# Altium PCB DAP-PCB.PcbDoc (part 1 of 5)
Units mm, origin at the board's own origin, x right, y up, seen from the top; angles counter-clockwise.
Board outline 54.75 x 54.75 mm, 6 copper layers (L1 (SIG/PWR), L2 (GND), L3 (SIG), L4 (PWR), L5 (GND), L6 (SIG/PWR)), stack 1.65 mm thick; 270 components, 172 nets, 891 pads, 308 vias.
Unrouted connection lines stored in the file: 5.
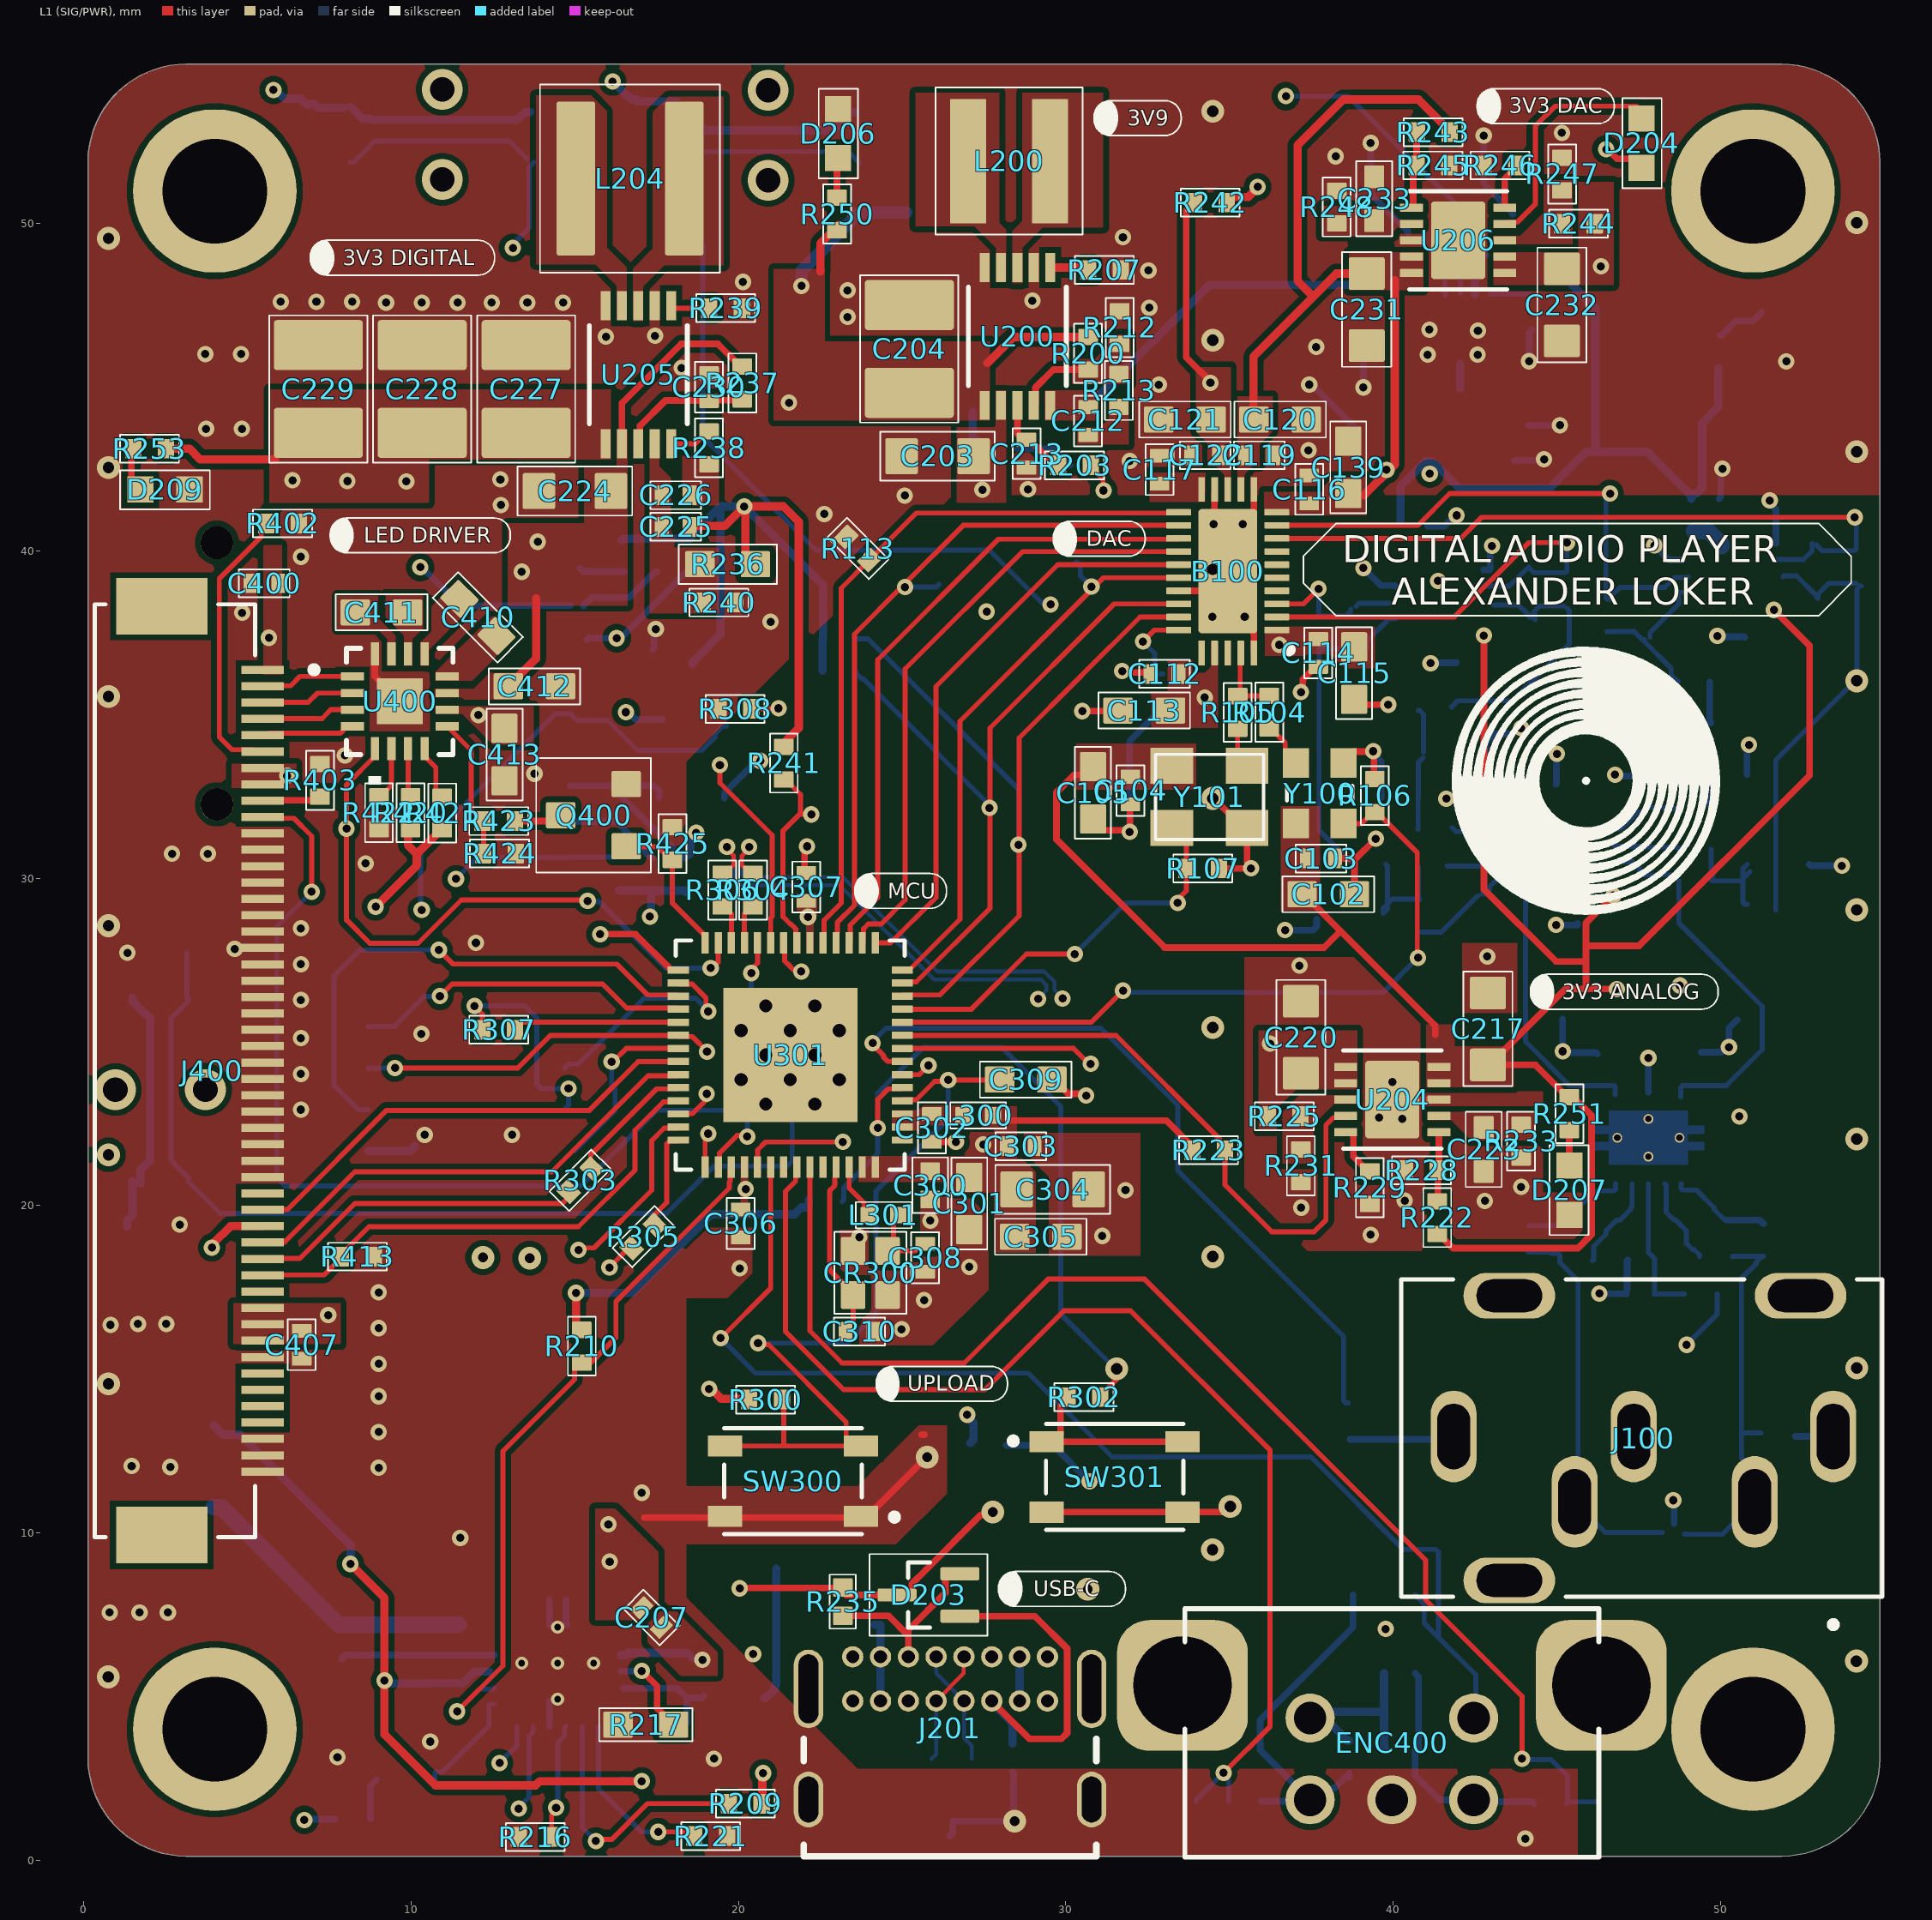
[diagram p0: L1 (SIG/PWR) view]
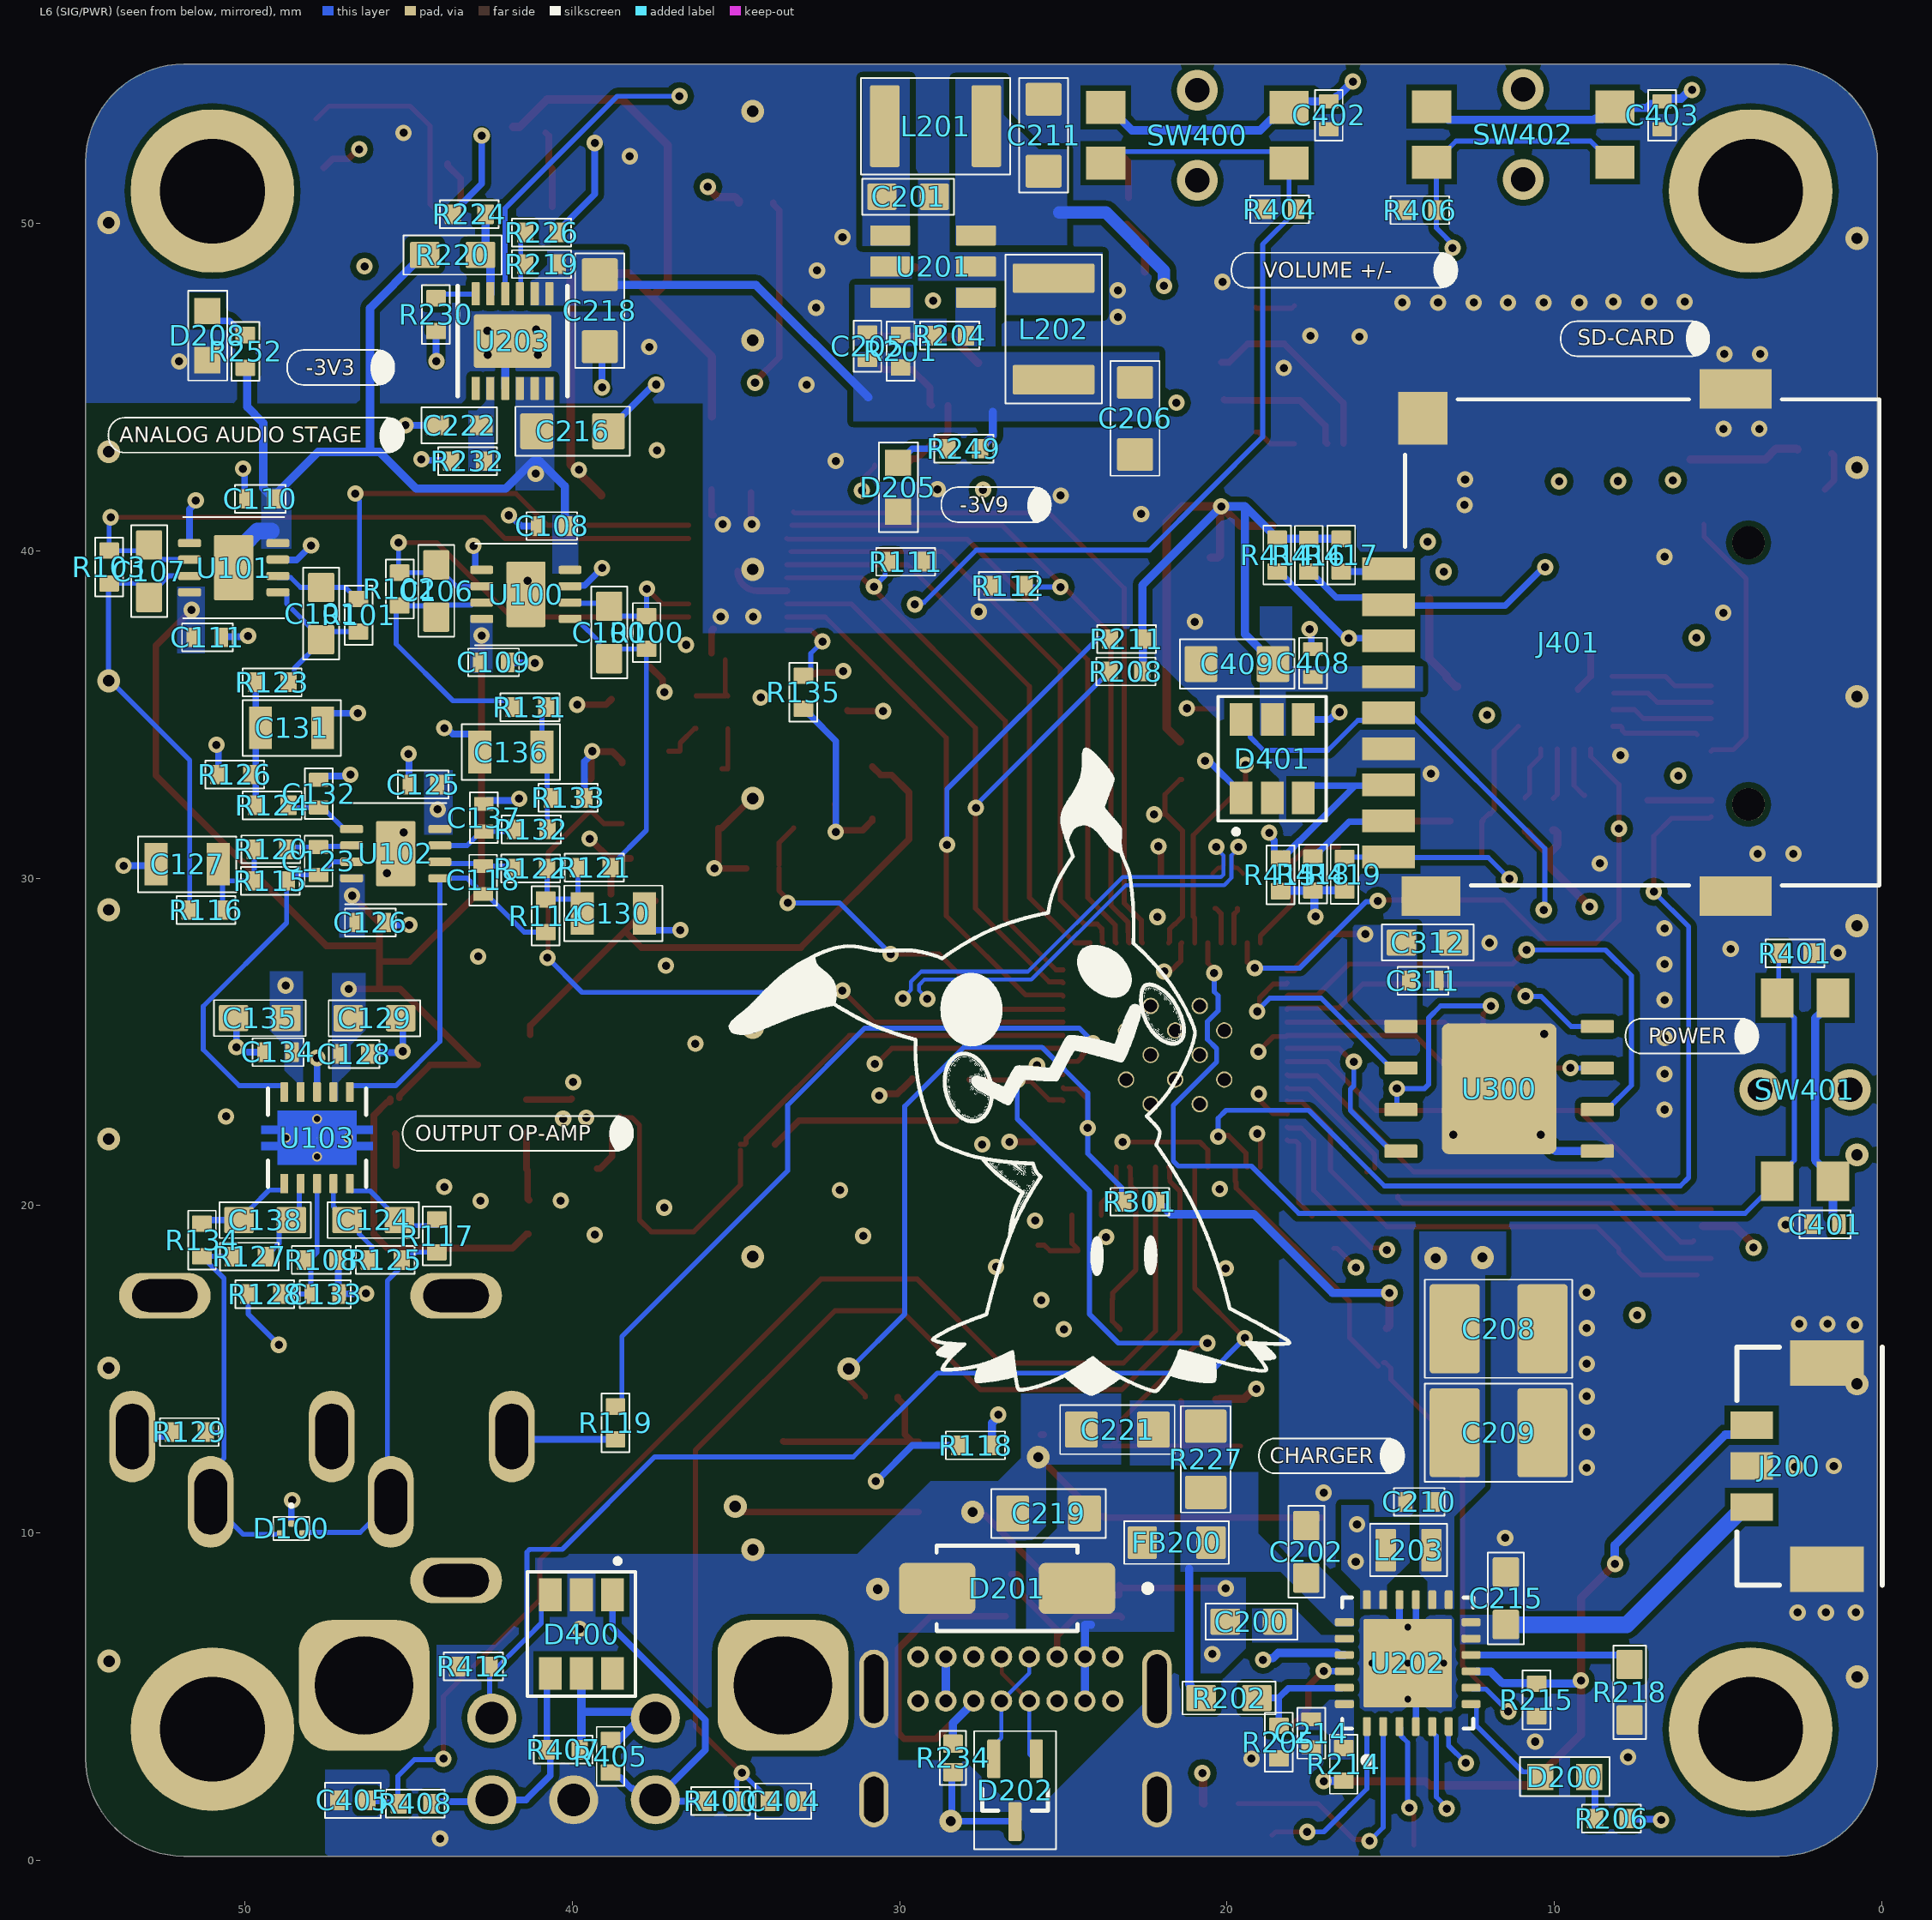
[diagram p1: L6 (SIG/PWR) view, seen from below]
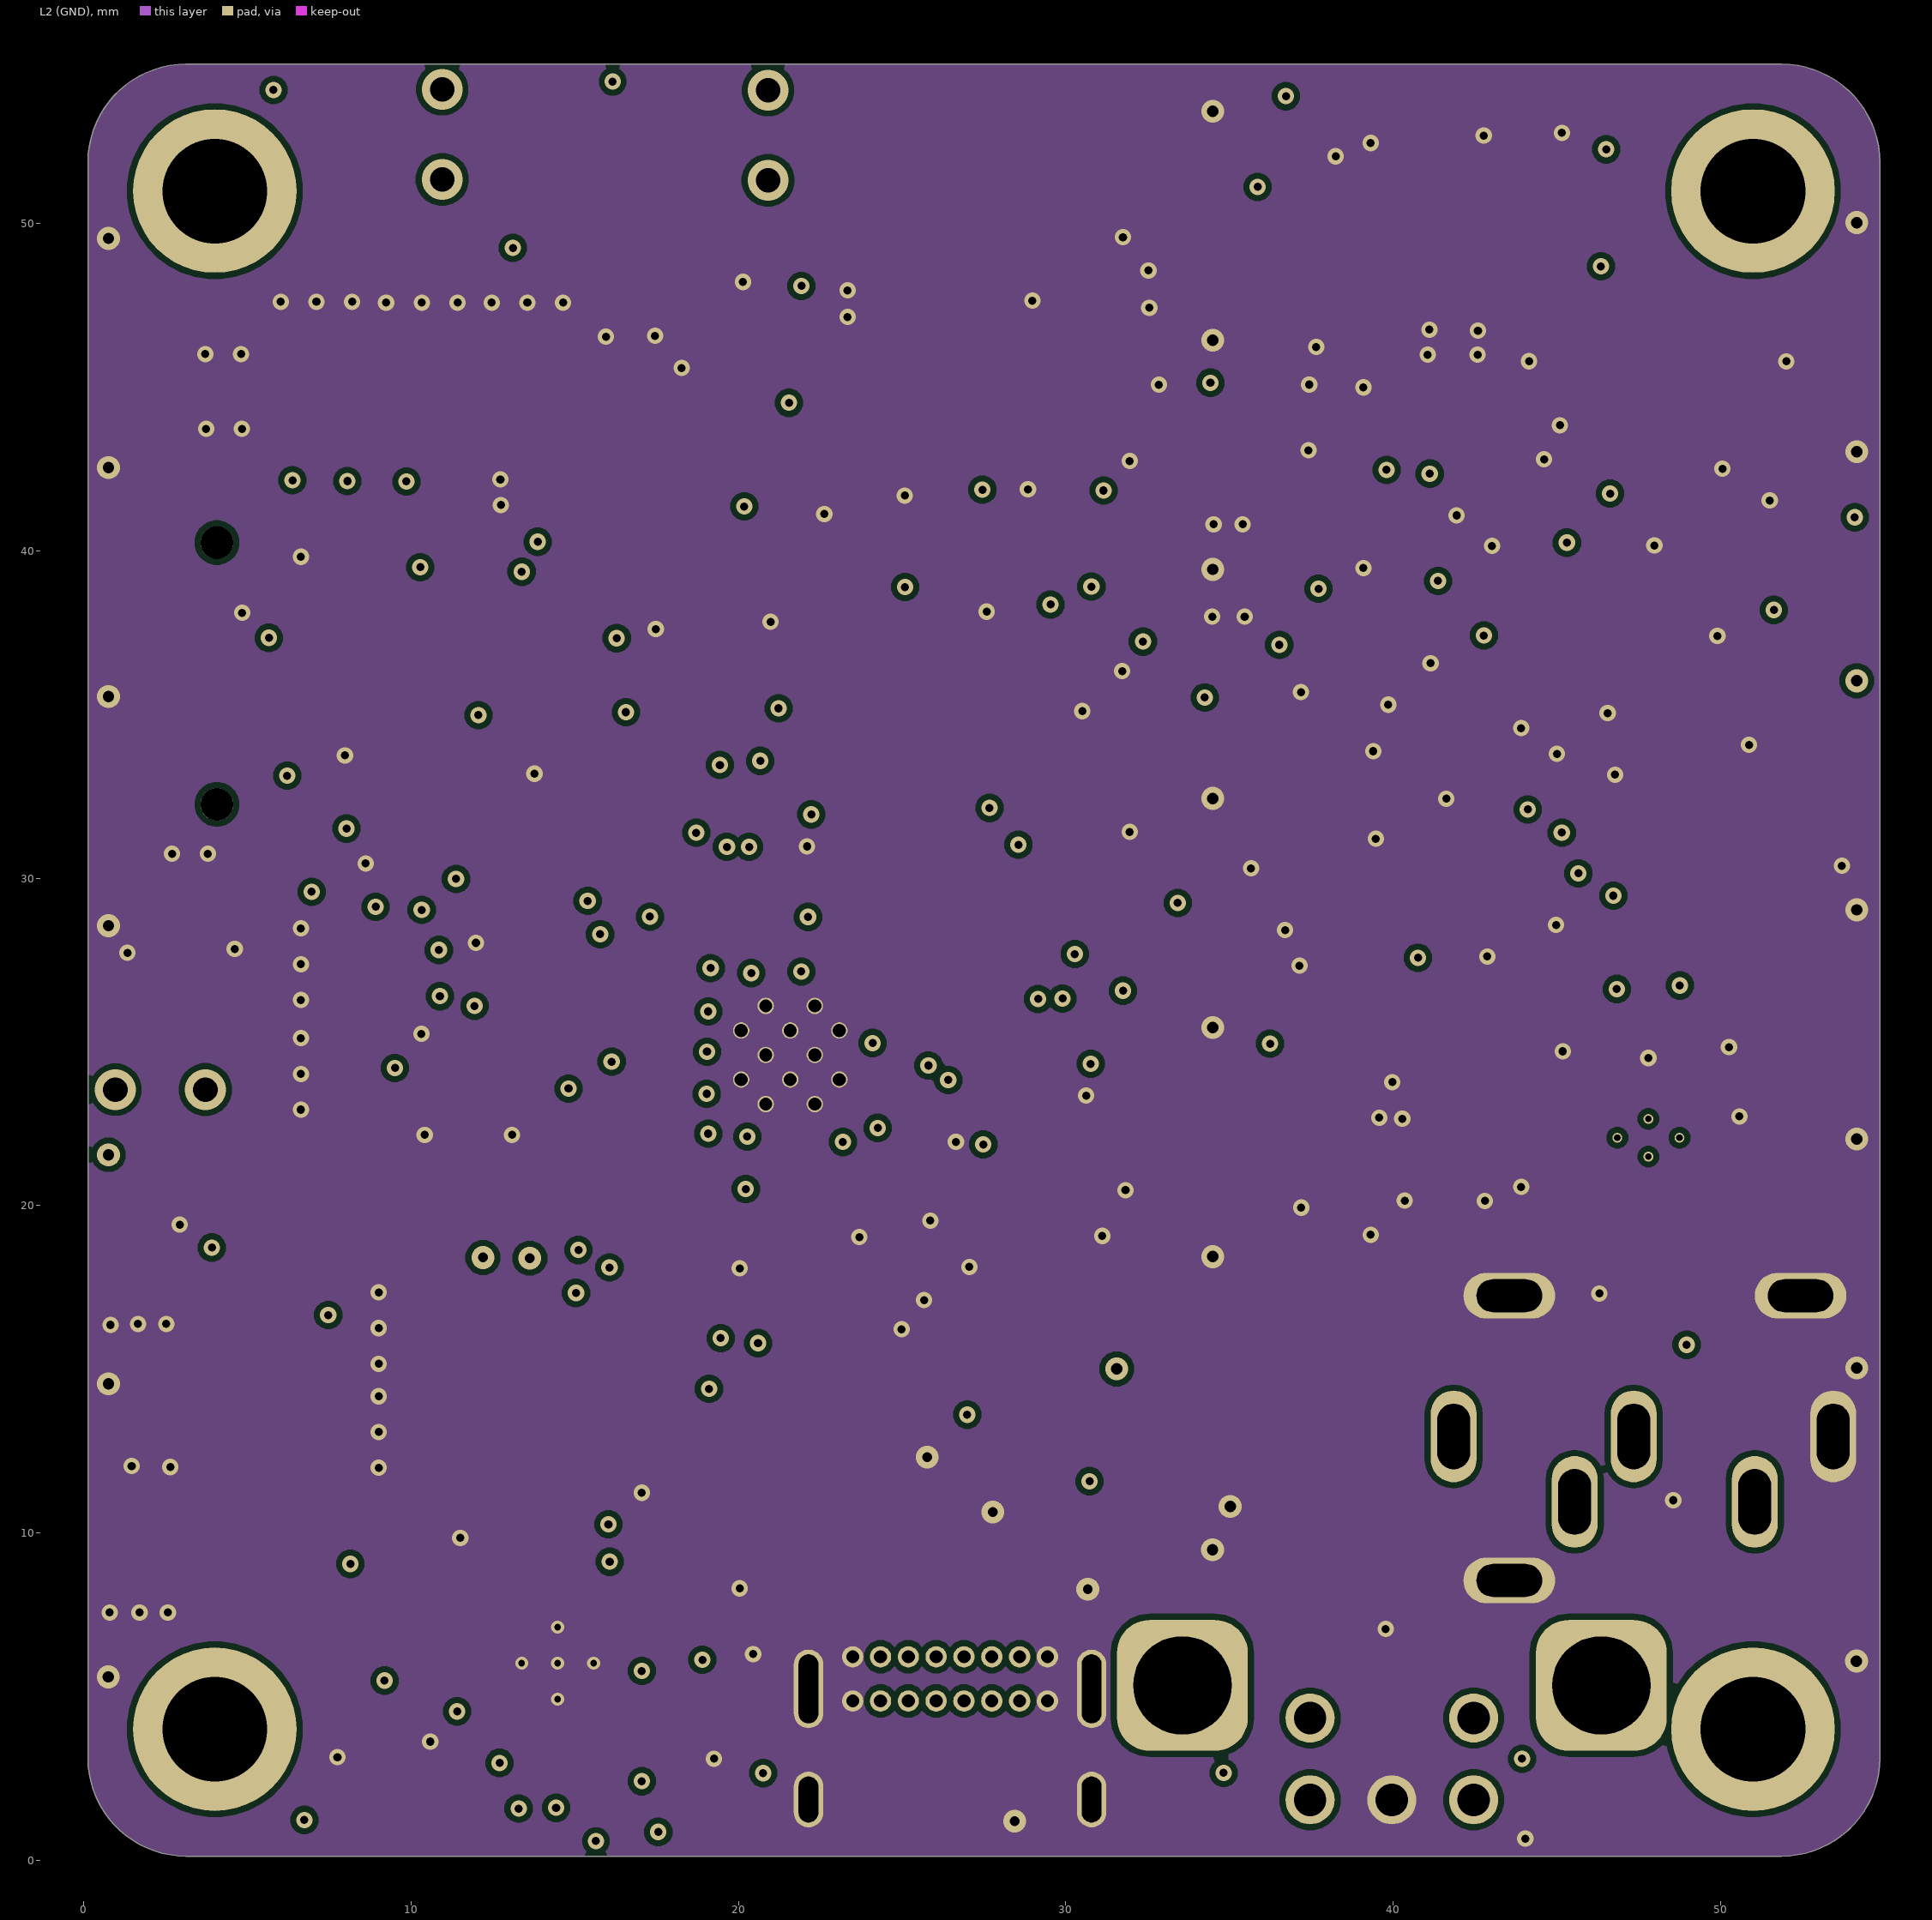
[diagram p2: L2 (GND)]
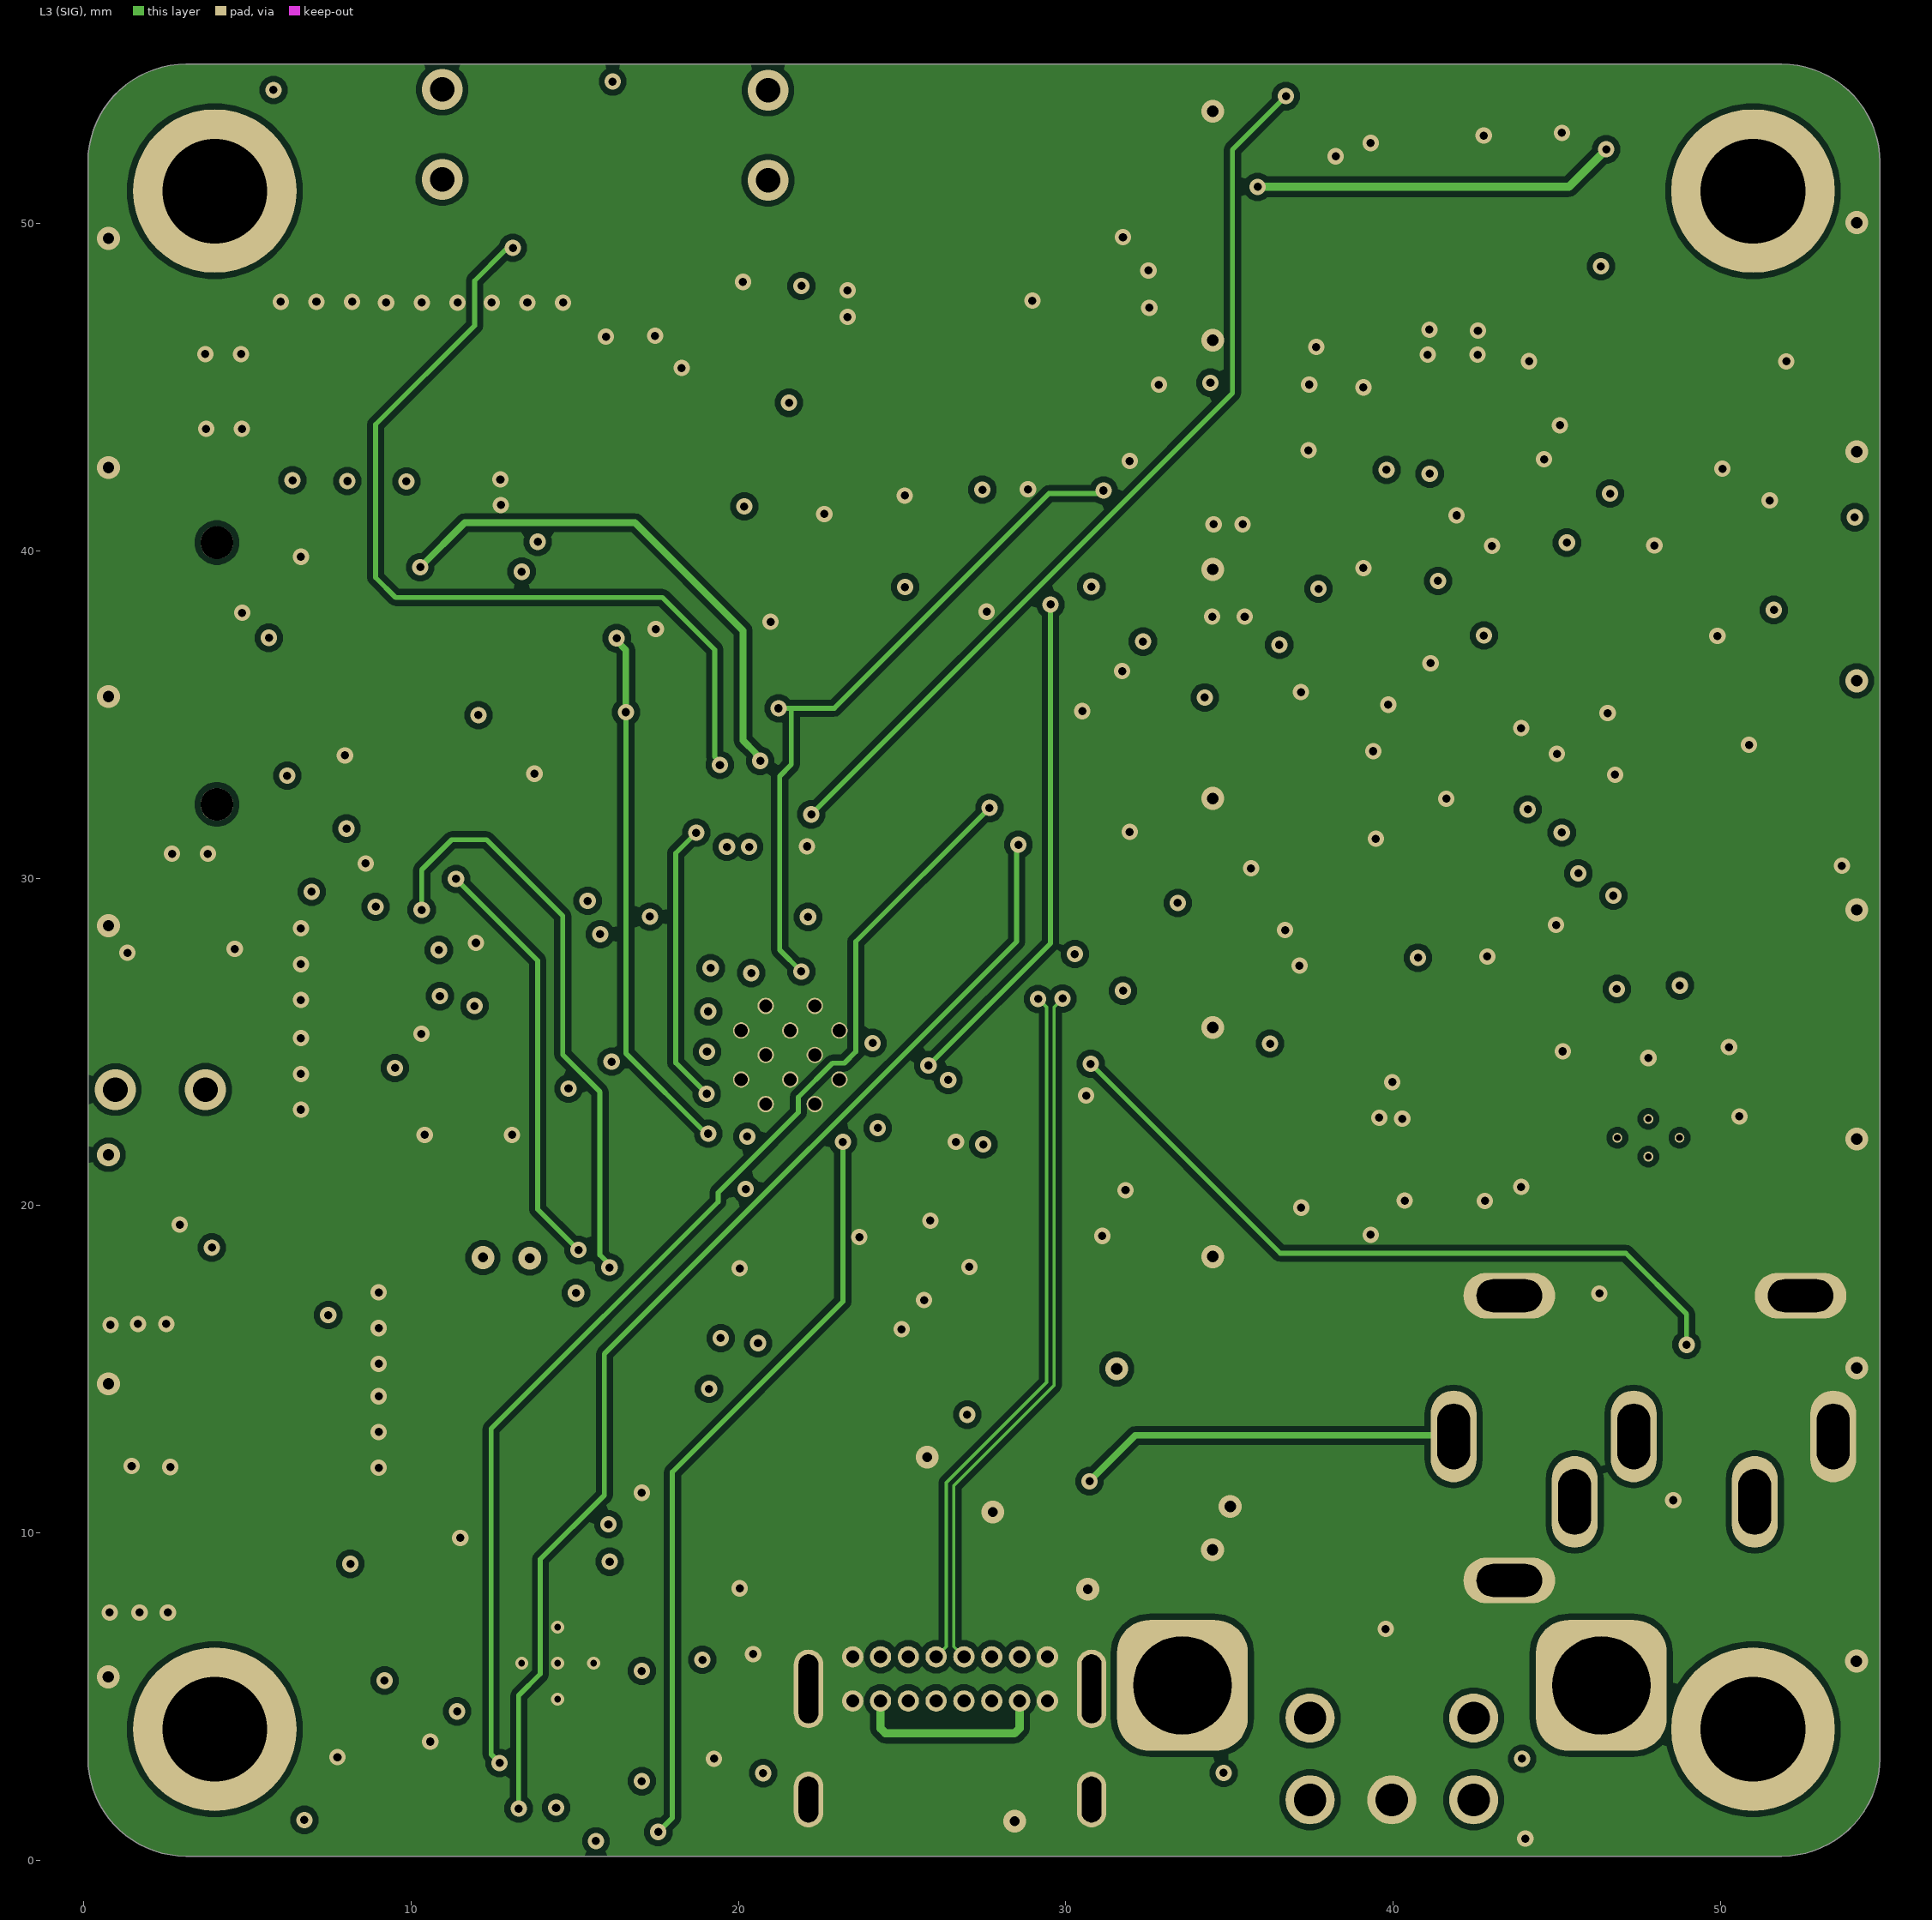
[diagram p3: L3 (SIG)]
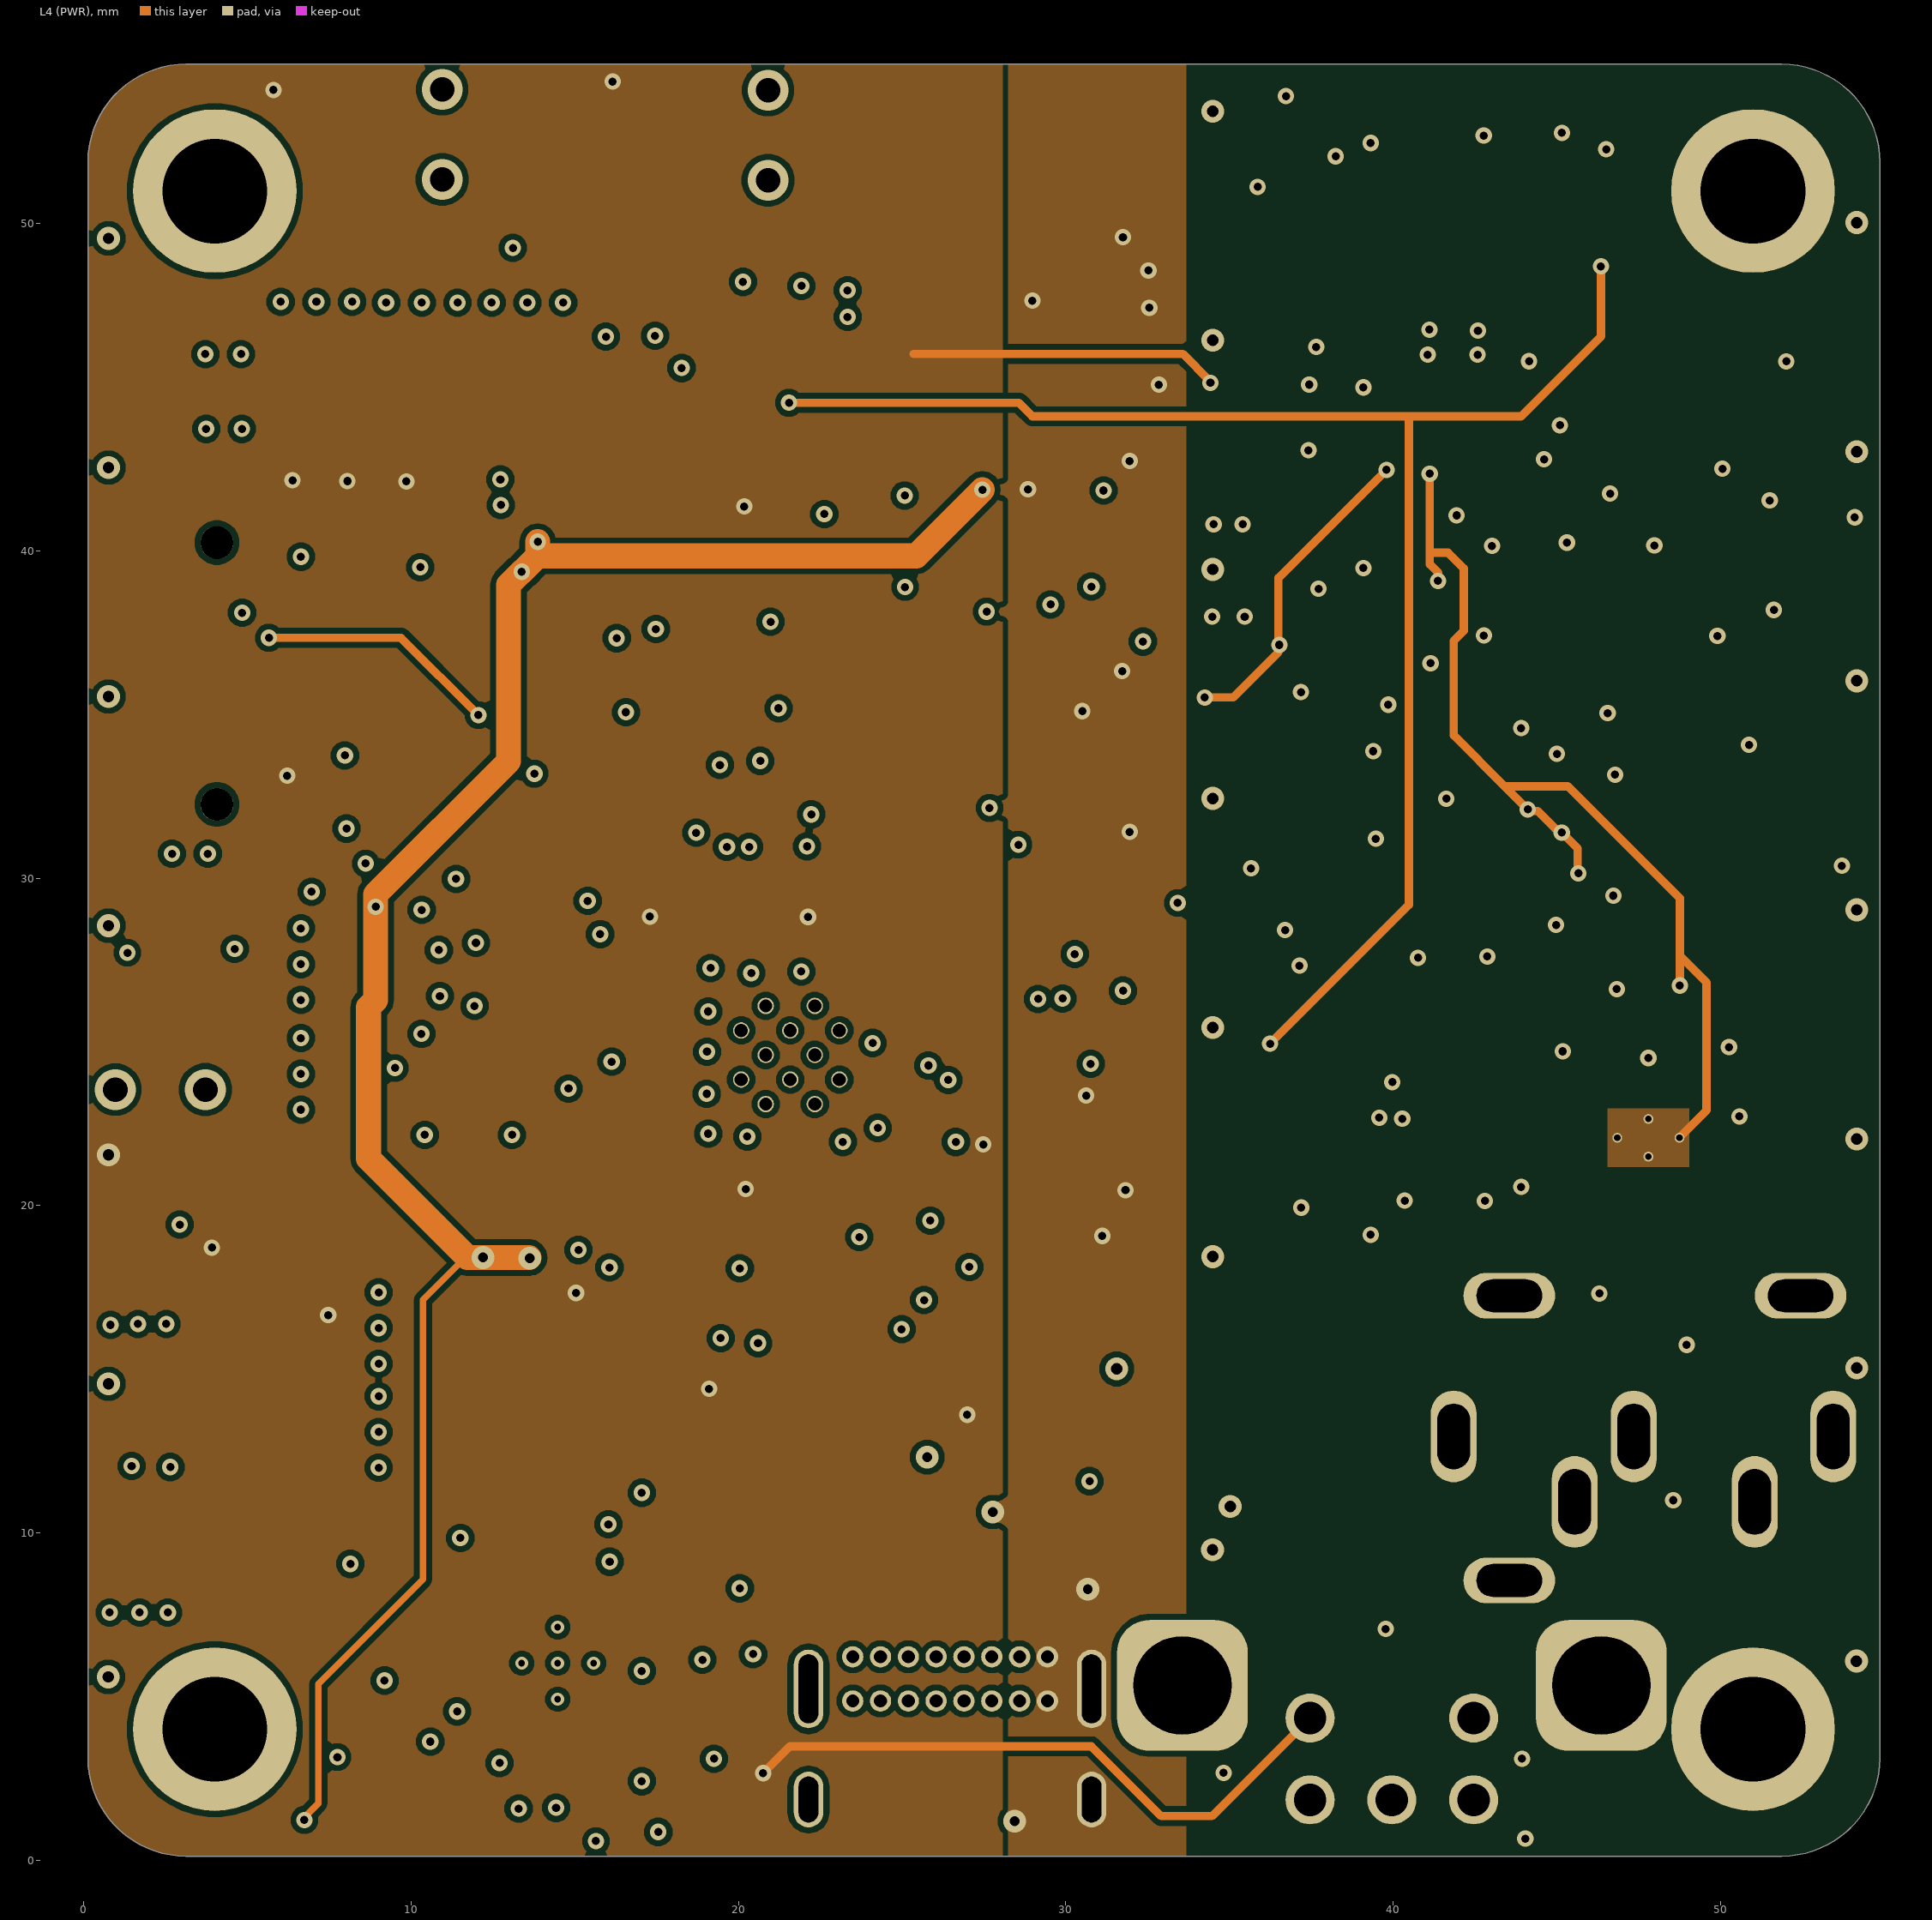
[diagram p4: L4 (PWR)]
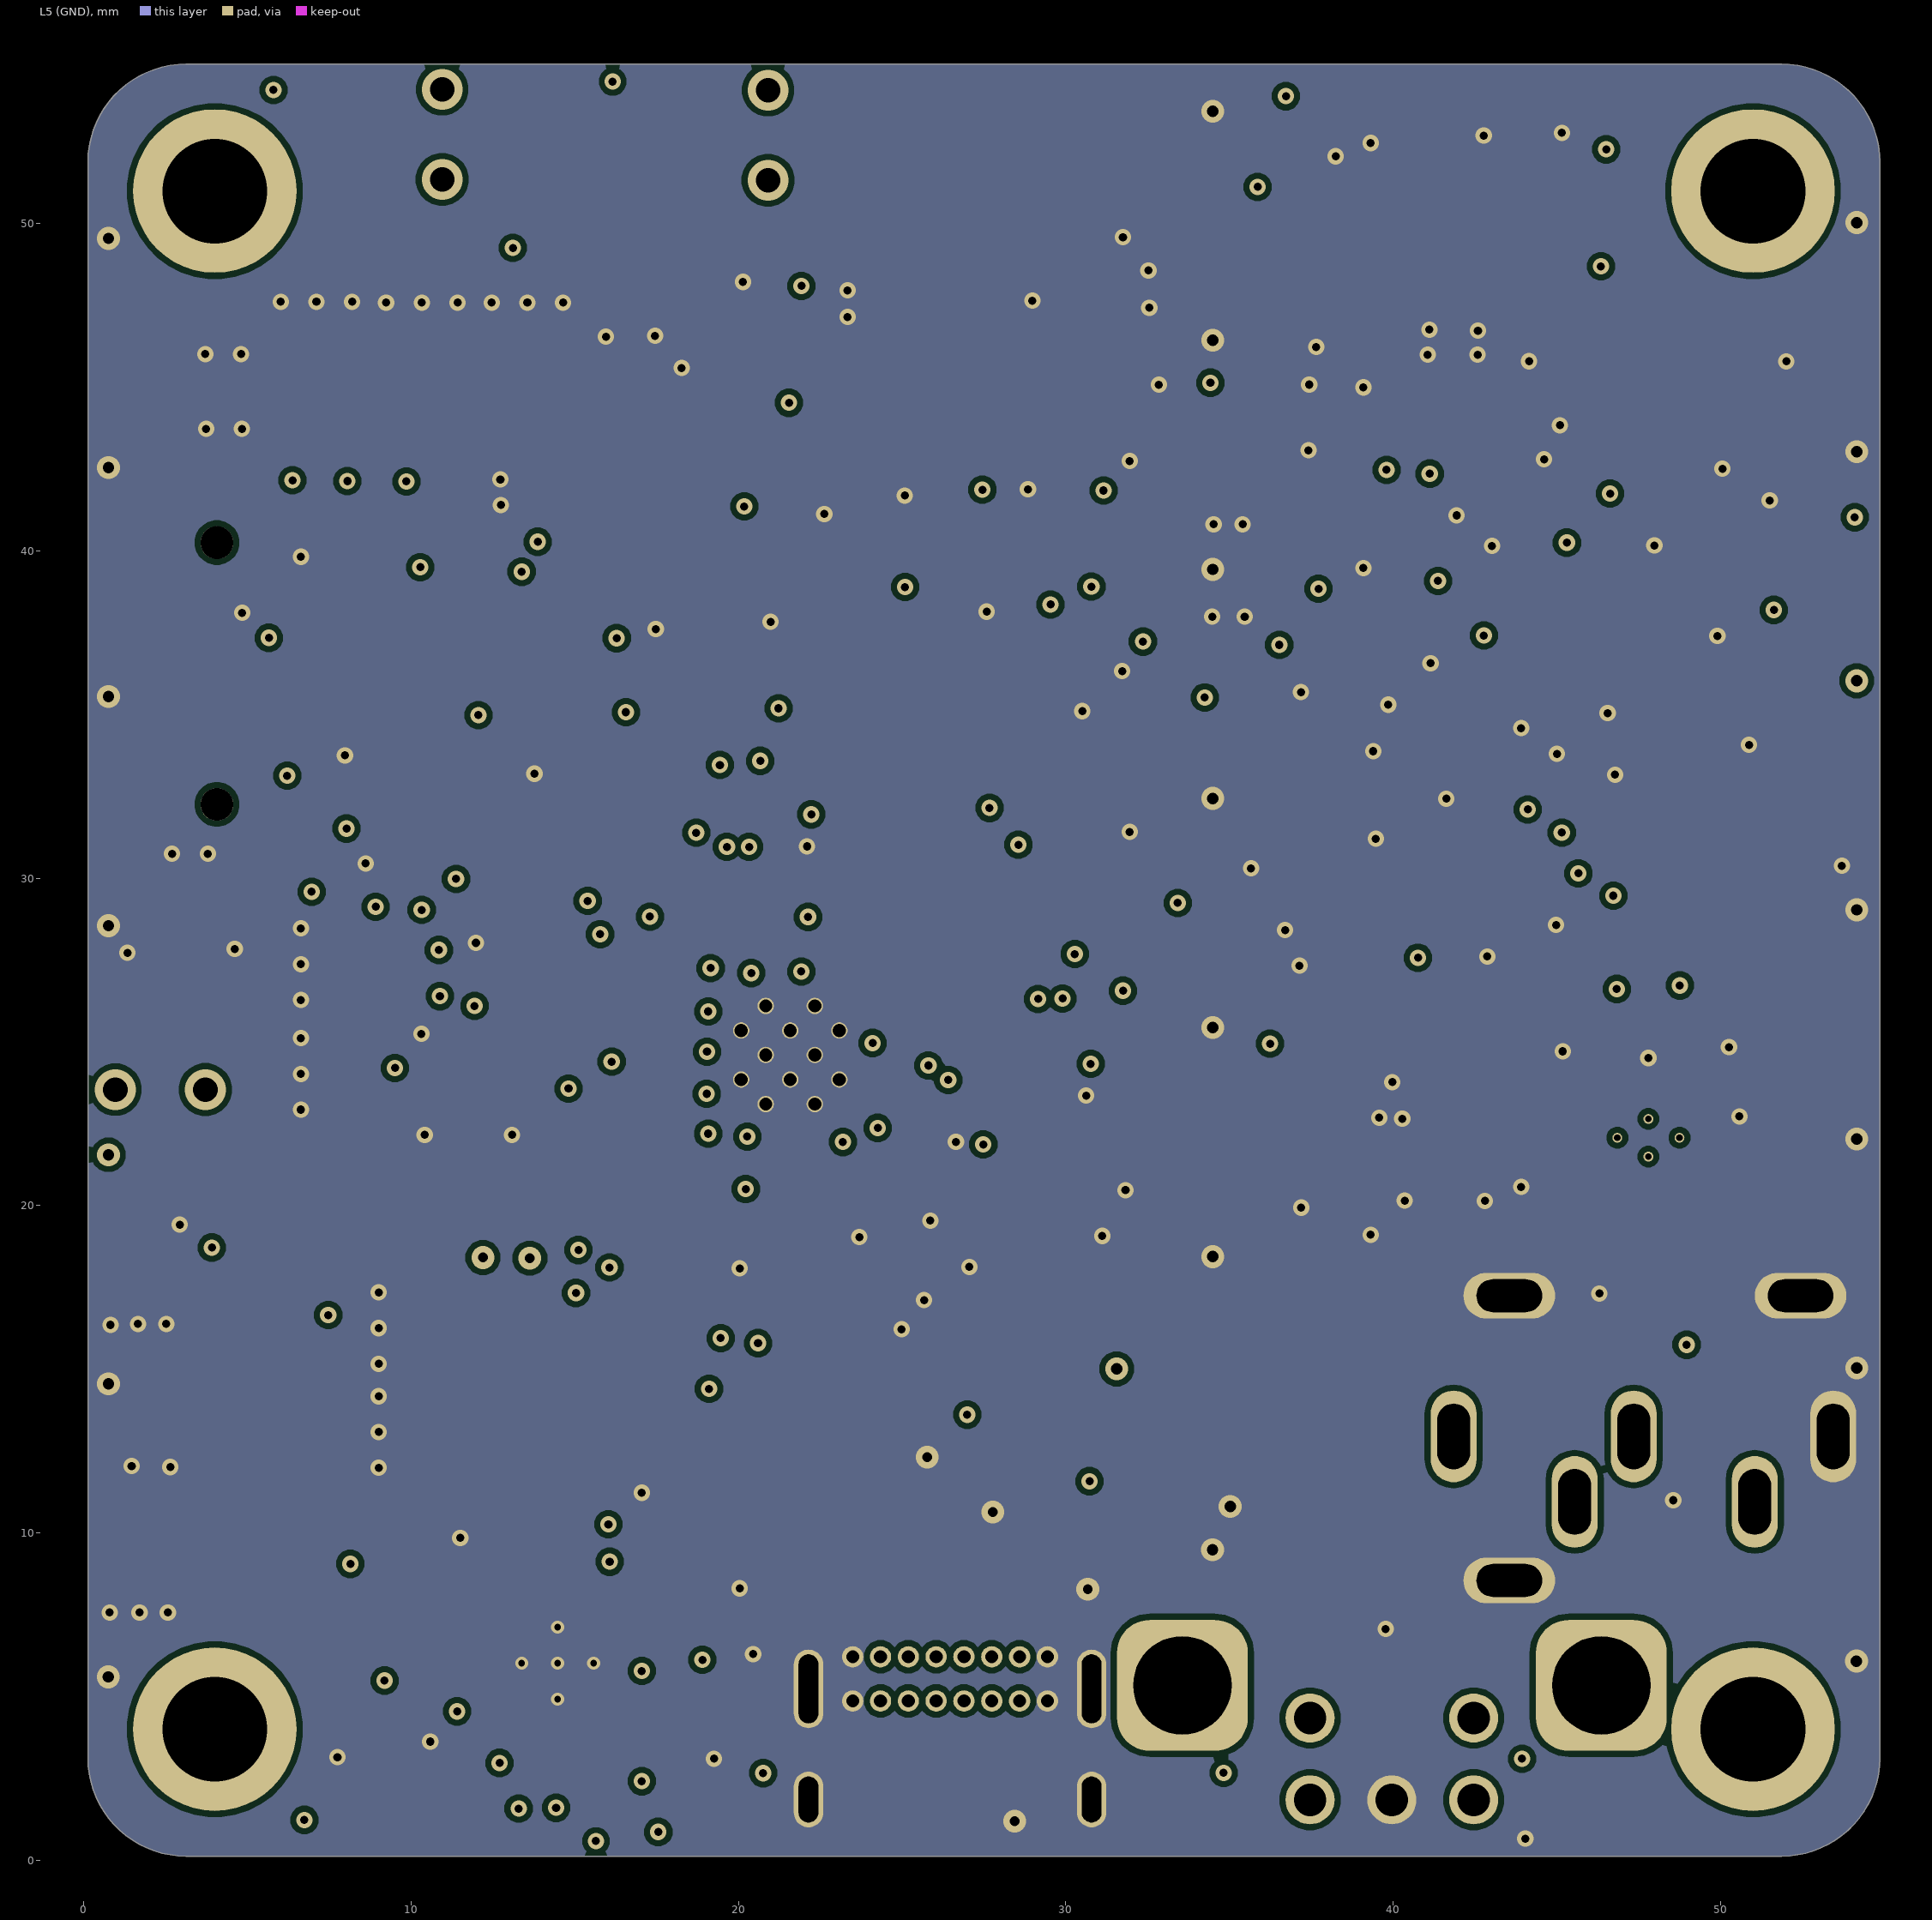
[diagram p5: L5 (GND)]

## Layer stack, top to bottom
Top Solder: solder mask 0.031, Solder Resist, Dk 4
L1 (SIG/PWR): signal copper 0.035
Dielectric 1: prepreg 0.0994, 3313, Dk 4.1
L2 (GND): signal copper 0.0152
Dielectric 8: core 0.1, Core-009, Dk 4.6
L3 (SIG): signal copper 0.0152
Dielectric 6: prepreg 0.2104, 7628, Dk 4.4
Dielectric 2: core 0.7, Core-009, Dk 4.6
Dielectric 7: prepreg 0.2104, 7628, Dk 4.4
L4 (PWR): signal copper 0.0152
Dielectric 4: core 0.1, Core-009, Dk 4.6
L5 (GND): signal copper 0.0152
Dielectric 3: prepreg 0.0994, 3313, Dk 4.1
L6 (SIG/PWR): signal copper 0.035
Bottom Solder: solder mask 0.031, Solder Resist, Dk 4

## Board outline
0.123,3.123 0.123,51.877 cw(c3.123,51.877) 3.123,54.877 51.877,54.877 cw(c51.877,51.877) 54.877,51.877 54.877,3.123 cw(c51.877,3.123) 51.877,0.123 3.123,0.123 cw(c3.123,3.123)
cut-out: -30.48,37.49 -30.48,12.37 -7.976,12.37 -7.976,28.626 -21.031,28.626 -21.031,44.374 -39.878,44.374 -39.878,-5.283

## Design rules (kind name [scope] priority, off if disabled: settings)
Clearance [All] p1: gap=0.178 ignorepadtopadclearanceinfootprint=FALSE except(0.12: Arc-Arc Arc-Track Track-Track)
DiffPairsRouting [All] p1: maxlimit=0.127 minlimit=0.127 mostfreqgap=0.127 toplayer_minwidth=0.121 toplayer_maxwidth=0.121 toplayer_prefwidth=0.121 midlayer1_minwidth=0.082 midlayer1_maxwidth=0.082 midlayer1_prefwidth=0.082 midlayer2_minwidth=0.101 midlayer2_maxwidth=0.101 midlayer2_prefwidth=0.101 midlayer3_minwidth=0.101 midlayer3_maxwidth=0.101 midlayer3_prefwidth=0.101 midlayer4_minwidth=0.081 midlayer4_maxwidth=0.081 midlayer4_prefwidth=0.081 bottomlayer_minwidth=0.121 bottomlayer_maxwidth=0.121 bottomlayer_prefwidth=0.121 impedanceprofiledriven=TRUE impedanceprofileid={D838837C-7825-4B87-9FED-7A096DA422F5} impedanceprofilevalue=90.000000 maxuncoupledlength=12.7
MinimumSolderMaskSliver [All] p1: minsoldermaskwidth=0.08
PlaneConnect [All] p1: planeconnectstyle=Direct reliefexpansion=0.508 reliefentries=4 reliefconductorwidth=0.254 reliefairgap=0.254
PolygonConnect [All] p1: connectstyle=Direct reliefconductorwidth=0.254 reliefentries=4 polygonreliefangle="90 Angle" airgapwidth=0.254
RoutingVias [All] p1: holewidth=0.711 width=1.27 viastyle="Through Hole" minholewidth=0.711 minwidth=1.27 maxholewidth=0.711 maxwidth=1.27
SilkToSilkClearance [All] p1: silktosilkclearance=0.102
SilkToSolderMaskClearance [IsPad] p1: minsilkscreentomaskgap=0.075 clearancetoexposedcopper=TRUE
SolderMaskExpansion [All] p1: expansion=0.102 istentingtop=FALSE
SupplyNets "Schematic Supply Nets_2" [InNet('+3V3_DIG')] p1: voltage=0.000
SupplyNets "Schematic Supply Nets_4" [InNet('-3V3')] p2: voltage=0.000
SupplyNets "Schematic Supply Nets_3" [InNet('+3V3_DAC')] p3: voltage=0.000
SupplyNets "Schematic Supply Nets" [InNet('+3V3_ANALOG')] p4: voltage=0.000
SupplyNets "Schematic Supply Nets_14" [InNet('-3V9')] p5: voltage=0.000
SupplyNets "Schematic Supply Nets_13" [InNet('VUSB')] p6: voltage=0.000
SupplyNets "Schematic Supply Nets_12" [InNet('+3V9')] p7: voltage=0.000
SupplyNets "Schematic Supply Nets_11" [InNet('SYS')] p8: voltage=0.000
SupplyNets "Schematic Supply Nets_10" [InNet('GND')] p9: voltage=0.000
SupplyNets "Schematic Supply Nets_7" [InNet('VDD_SPI')] p10: voltage=0.000
SupplyNets "Schematic Supply Nets_1" [InNet('+LED')] p11: voltage=0.000
Width [All] p1: maxlimit=2.54 minlimit=0.152 preferedwidth=0.203 toplayer_minwidth=0.152 toplayer_prefwidth=0.203 minimp=50.000000 maximp=50.000000 favimp=50.000000
25 further rules are at their usual default settings.

## Classes and differential pairs
component class DAP-Power-2: C200 C201 C202 C203 C204 C205 C206 C207 C208 C209 C210 C211 C212 C213 C214 C215 C216 C217 C218 C219 C220 C221 C222 C223 C224 C225 C226 C227 C228 C229 C230 C231 C232 C233 D200 D201 D202 D203 D204 D205 D206 D207 D208 D209 FB200 J200 J201 L200 L201 L202 L203 L204 R200 R201 R202 R203 R204 R205 R206 R207 R208 R209 R210 R211 R212 R213 R214 R215 R216 R217 R218 R219 R220 R221 R222 R223 R224 R225 R226 R227 R228 R229 R230 R231 R232 R233 R234 R235 R236 R237 R238 R239 R240 R241 R242 R243 R244 R245 R246 R247 R248 R249 R250 R251 R252 R253 U200 U201 U202 U203 U204 U205 U206
component class DAP-Peripherals-4: C400 C401 C402 C403 C404 C405 C407 C408 C409 C410 C411 C412 C413 D400 D401 ENC400 J400 J401 Q400 R400 R401 R402 R403 R404 R405 R406 R407 R408 R412 R413 R414 R415 R416 R417 R418 R419 R420 R421 R422 R423 R424 R425 SW400 SW401 SW402 U400
component class DAP-MCU-3: C300 C301 C302 C303 C304 C305 C306 C307 C308 C309 C310 C311 C312 CR300 L300 L301 R300 R301 R302 R303 R304 R305 R306 R307 R308 SW300 SW301 U300 U301
component class DAP-Audio-1: B100 C100 C101 C102 C103 C104 C105 C106 C107 C108 C109 C110 C111 C112 C113 C114 C115 C116 C117 C118 C119 C120 C121 C122 C123 C124 C125 C126 C127 C128 C129 C130 C131 C132 C133 C134 C135 C136 C137 C138 C139 D100 J100 R100 R101 R102 R103 R104 R105 R106 R107 R108 R111 R112 R113 R114 R115 R116 R117 R118 R119 R120 R121 R122 R123 R124 R125 R126 R127 R128 R129 R131 R132 R133 R134 R135 U100 U101 U102 U103 Y100 Y101
differential pair USB_D: +USB_D_P -USB_D_N

## Components (designator, comment, footprint, x,y, rotation, side; value= is the part's Value field where it differs from the comment)
B100 "DAC Audiophile" QFN40P300X500X80-31N-D 34.952,39.386 r180 top
C100 "CAP CER 1500PF 50V C0G/NP0 0603" CAPC1608X100N 38.878,37.512 r270 bottom
C101 "CAP CER 1500PF 50V C0G/NP0 0603" CAPC1608X100N 47.679,38.09 r270 bottom
C102 "CAP CER 1UF 25V X7R 0603" CAPC1608X100N 38.024,29.515 r0 top
C103 "CAP CER 0.1UF 50V X7R 0402" CAPC1005X60N 37.802,30.607 r180 top
C104 "CAP CER 0.1UF 50V X7R 0402" CAPC1005X60N 31.979,32.683 r90 top
C105 "CAP CER 1UF 25V X7R 0603" CAPC1608X100N 30.836,32.614 r270 top
C106 "CAP CER 1500PF 50V C0G/NP0 0603" CAPC1608X100N 44.161,38.782 r270 bottom
C107 "CAP CER 1500PF 50V C0G/NP0 0603" CAPC1608X100N 52.937,39.386 r270 bottom
C108 "CAP CER 0.1UF 50V X7R 0402" CAPC1005X60N 40.63,40.764 r180 bottom
C109 "CAP CER 0.1UF 50V X7R 0402" CAPC1005X60N 42.408,36.598 r0 bottom
C110 "CAP CER 0.1UF 50V X7R 0402" CAPC1005X60N 49.54,41.596 r180 bottom
C111 "CAP CER 0.1UF 50V X7R 0402" CAPC1005X60N 51.156,37.363 r0 bottom
C112 "CAP CER 0.1UF 50V X7R 0402" CAPC1005X60N 33.02,36.246 r0 top
C113 "CAP CER 1UF 25V X7R 0603" CAPC1608X100N 32.398,35.128 r180 top
C114 "CAP CER 0.1UF 50V X7R 0402" CAPC1005X60N 37.719,36.888 r90 top
C115 "CAP CER 1UF 25V X7R 0603" CAPC1608X100N 38.811,36.271 r270 top
C116 "CAP CER 0.1UF 50V X7R 0402" CAPC1005X60N 37.44,41.885 r270 top
C117 "CAP CER 4.7UF 6.3V X5R 0402" CAPC1005X60N 32.868,42.487 r270 top
C118 "CAP CER 2700PF 50V C0G/NP0 0402" CAPC1005X60N 42.729,29.947 r90 bottom
C119 "CAP CER 0.1UF 50V X7R 0402" CAPC1005X60N 35.916,42.926 r180 top
C120 "CAP CER 1UF 25V X7R 0603" CAPC1608X100N 36.551,44.018 r0 top
C121 "CAP CER 1UF 25V X7R 0603" CAPC1608X100N 33.642,44.018 r180 top
C122 "CAP CER 0.1UF 50V X7R 0402" CAPC1005X60N 34.265,42.926 r0 top
C123 "CAP CER 2700PF 50V C0G/NP0 0402" CAPC1005X60N 47.758,30.531 r90 bottom
C124 "CAP CER 1500PF 50V C0G/NP0 0603" CAPC1608X100N 46.087,19.558 r0 bottom
C125 "CAP CER 0.1UF 50V X7R 0402" CAPC1005X60N 44.558,32.868 r180 bottom
C126 "CAP CER 0.1UF 50V X7R 0402" CAPC1005X60N 46.177,28.651 r0 bottom
C127 "CAP CER 0.013UF 50V C0G/NP0 0805" CAP_MUR_0805 51.771,30.429 r0 bottom
C128 "CAP CER 0.1UF 50V X7R 0402" CAPC1005X60N 46.672,24.632 r0 bottom
C129 "CAP CER 1UF 25V X7R 0603" CAPC1608X100N 46.049,25.724 r180 bottom
C130 "CAP CER 0.013UF 50V C0G/NP0 0805" CAP_MUR_0805 38.751,28.927 r180 bottom
C131 "CAP CER 0.013UF 50V C0G/NP0 0805" CAP_MUR_0805 48.58,34.595 r180 bottom
C132 "CAP CER 2700PF 50V C0G/NP0 0402" CAPC1005X60N 47.753,32.588 r90 bottom
C133 "CAP CER 0.1UF 50V X7R 0402" CAPC1005X60N 47.556,17.297 r0 bottom
C134 "CAP CER 0.1UF 50V X7R 0402" CAPC1005X60N 48.997,24.689 r180 bottom
C135 "CAP CER 1UF 25V X7R 0603" CAPC1608X100N 49.555,25.73 r0 bottom
C136 "CAP CER 0.013UF 50V C0G/NP0 0805" CAP_MUR_0805 41.885,33.858 r0 bottom
C137 "CAP CER 2700PF 50V C0G/NP0 0402" CAPC1005X60N 42.708,31.852 r90 bottom
C138 "CAP CER 1500PF 50V C0G/NP0 0603" CAPC1608X100N 49.389,19.558 r180 bottom
C139 "CAP CER 1UF 25V X7R 0603" CAPC1608X100N 38.633,42.558 r90 top
C200 "CAP CER 1UF 25V X7R 0603" CAPC1608X100N 19.253,7.29 r0 bottom
C201 "CAP CER 2.2UF 25V X7R 0603" CAPC1608X100N 29.743,50.825 r180 bottom
C202 "CAP CER 2.2UF 25V X7R 0603" CAPC1608X100N 17.577,9.423 r90 bottom
C203 "CAP CER 10UF 10V X7R 0805" CAPC2012X140N 26.086,42.901 r0 top
C204 "CAP CER 22UF 25V X7S 1210" CAPC3225X270N 25.222,46.177 r270 top
C205 "CAP CER 22PF 50V C0G/NP0 0402" CAPC1005X60N 30.988,46.26 r270 bottom
C206 "CAP CER 10UF 10V X7R 0805" CAPC2012X140N 22.809,44.053 r90 bottom
C207 "CAP CER 0.033UF 16V X7R 0402" CAPC1005X60N 17.348,7.417 r315 top
C208 "CAP CER 22UF 25V X7S 1210" CAPC3225X270N 11.703,16.237 r0 bottom
C209 "CAP CER 22UF 25V X7S 1210" CAPC3225X270N 11.703,13.062 r0 bottom
C210 "CAP CER 0.1UF 50V X7R 0402" CAPC1005X60N 14.129,10.947 r180 bottom
C211 "CAP CER 10UF 10V X7R 0805" CAPC2012X140N 25.603,52.705 r270 bottom
C212 "CAP CER 1500PF 50V C0G/NP0 0402" CAPC1005X60N 30.683,43.974 r90 top
C213 "CAP CER 0.1UF 50V X7R 0402" CAPC1005X60N 28.804,42.977 r90 top
C214 "CAP CER 1UF 35V X5R 0402" CAPC1005X60N 17.424,3.879 r90 bottom
C215 "CAP CER 1UF 25V X7R 0603" CAPC1608X100N 11.481,8.001 r90 bottom
C216 "CAP CER 10UF 10V X7R 0805" CAPC2012X140N 39.997,43.663 r0 bottom
C217 "CAP CER 10UF 10V X7R 0805" CAPC2012X140N 42.901,25.4 r270 top
C218 "CAP CER 10UF 10V X7R 0805" CAPC2012X140N 39.167,47.346 r90 bottom
C219 "CAP CER 4.7UF 16V X7R 0805" CAPC2012X140N 25.451,10.592 r180 bottom
C220 "CAP CER 10UF 10V X7R 0805" CAPC2012X140N 37.186,25.146 r270 top
C221 "CAP CER 4.7UF 16V X7R 0805" CAPC2012X140N 23.35,13.157 r180 bottom
C222 "CAP TANT 2.2UF 20% 16V 0603" CAP_298D225X0016M2T 43.459,43.84 r180 bottom
C223 "CAP TANT 2.2UF 20% 16V 0603" CAP_298D225X0016M2T 42.774,21.717 r270 top
C224 "CAP CER 10UF 10V X7R 0805" CAPC2012X140N 15.004,41.834 r0 top
C225 "CAP CER 100PF 50V C0G/NP0 0402" CAPC1005X60N 18.085,40.742 r0 top
C226 "CAP CER 1500PF 50V C0G/NP0 0402" CAPC1005X60N 18.085,41.707 r0 top
C227 "CAP CER 22UF 25V X7S 1210" CAPC3225X270N 13.513,44.953 r270 top
C228 "CAP CER 22UF 25V X7S 1210" CAPC3225X270N 10.338,44.953 r270 top
C229 "CAP CER 22UF 25V X7S 1210" CAPC3225X270N 7.163,44.953 r270 top
C230 "CAP CER 0.1UF 50V X7R 0402" CAPC1005X60N 19.101,45.009 r270 top
C231 "CAP CER 10UF 10V X7R 0805" CAPC2012X140N 39.198,47.38 r90 top
C232 "CAP CER 10UF 10V X7R 0805" CAPC2012X140N 45.161,47.523 r90 top
C233 "CAP TANT 2.2UF 20% 16V 0603" CAP_298D225X0016M2T 39.426,50.766 r90 top
C300 "CAP CER 10000PF 16V X7R 0402" CAPC1005X55N 25.859,20.621 r90 top
C301 "CAP CER 1UF 25V X7R 0603" CAPC1608X100N 27.053,20.064 r270 top
C302 "CAP CER 0.1UF 50V X7R 0402" CAPC1005X60N 25.91,22.376 r90 top
C303 "CAP CER 0.1UF 50V X7R 0402" CAPC1005X60N 28.628,21.817 r180 top
C304 "CAP CER 10UF 10V X7R 0805" CAPC2012X140N 29.601,20.496 r180 top
C305 "CAP CER 1UF 25V X7R 0603" CAPC1608X100N 29.237,19.048 r0 top
C306 "CAP CER 0.1UF 50V X7R 0402" CAPC1005X60N 20.068,19.455 r90 top
C307 "CAP CER 0.1UF 50V X7R 0402" CAPC1005X60N 22.073,29.737 r270 top
C308 "CAP CER 12PF 50V C0G/NP0 0402" CAPC1005X60N 25.707,18.406 r270 top
C309 "CAP CER 1UF 25V X7R 0603" CAPC1608X100N 28.778,23.851 r0 top
C310 "CAP CER 12PF 50V C0G/NP0 0402" CAPC1005X60N 23.698,16.154 r0 top
C311 "CAP CER 0.1UF 50V X7R 0402" CAPC1005X60N 14.014,26.873 r0 bottom
C312 "CAP CER 1UF 25V X7R 0603" CAPC1608X100N 13.868,28.042 r180 bottom
C400 "CAP CER 0.1UF 50V X7R 0402" CAPC1005X60N 5.512,39.014 r0 top
C401 "CAP CER 0.1UF 50V X7R 0402" CAPC1005X60N 1.727,19.431 r180 bottom
C402 "CAP CER 0.1UF 50V X7R 0402" CAPC1005X60N 16.891,53.315 r90 bottom
C403 "CAP CER 0.1UF 50V X7R 0402" CAPC1005X60N 6.706,53.315 r90 bottom
C404 "CAP CER 10000PF 16V X7R 0402" CAPC1005X55N 33.553,1.803 r0 bottom
C405 "CAP CER 10000PF 16V X7R 0402" CAPC1005X55N 46.711,1.829 r180 bottom
C407 "CAP CER 0.1UF 50V X7R 0402" CAPC1005X60N 6.655,15.748 r90 top
C408 "CAP CER 0.1UF 50V X7R 0402" CAPC1005X60N 17.374,36.576 r270 bottom
C409 "CAP CER 10UF 10V X7R 0805" CAPC2012X140N 19.693,36.551 r180 bottom
C410 "CAP CER 1UF 25V X7R 0603" CAPC1608X100N 12.04,37.973 r315 top
C411 "CAP CER 1UF 25V X7R 0603" CAPC1608X100N 9.093,38.125 r180 top
C412 "CAP CER 1UF 25V X7R 0603" CAPC1608X100N 13.767,35.865 r0 top
C413 "CAP CER 1UF 25V X7R 0603" CAPC1608X100N 12.852,33.782 r270 top
CR300 "CRYSTAL 40.0000MHZ 10PF SMD" CRYST_ECS-400 24.03,17.946 r270 top
D100 "TVS DIODE 3.6VWM 8.4VC 3X2SON" IC_ESD122DMXR 48.59,10.135 r270 bottom
D200 "LED GREEN CLEAR CHIP SMD" LEDM1608X80 9.677,2.54 r180 bottom
D201 "TVS DIODE 7VWM 12VC SMA" DIOM5226X230N 26.721,8.306 r0 bottom
D202 "TVS DIODE 5.5VWM 12.4VC SC703" SOT65P210X110-3N 26.477,2.139 r270 bottom
D203 "TVS DIODE 5.5VWM 12.4VC SC703" SOT65P210X110-3N 25.806,8.103 r180 top
D204 "LED GREEN CLEAR CHIP SMD" LEDM1608X80 47.6,52.463 r270 top
D205 "LED GREEN CLEAR CHIP SMD" LEDM1608X80 30.048,41.947 r270 bottom
D206 "LED GREEN CLEAR CHIP SMD" LEDM1608X80 23.038,52.756 r270 top
D207 "LED GREEN CLEAR CHIP SMD" LEDM1608X80 45.39,20.472 r90 top
D208 "LED GREEN CLEAR CHIP SMD" LEDM1608X80 51.156,46.584 r270 bottom
D209 "LED GREEN CLEAR CHIP SMD" LEDM1608X80 2.477,41.885 r180 top
D400 "TVS, ESD, ARRAY, UNI-DIR, 5.0V," TVS_ARR_4UNI_FP 39.726,6.909 r270 bottom
D401 "TVS, ESD, ARRAY, UNI-DIR, 5.0V," TVS_ARR_4UNI_FP 18.618,33.655 r90 bottom
ENC400 "ENCODER MECH QUAD RGH ANG PC PIN" EN12-VS_TTE 42.465,10.581 r0 top
FB200 "FERRITE BEAD 120 OHM 0805 1LN" WE-CBF_0805_W4.0 21.539,9.703 r180 bottom
J100 "CONN JACK STEREO 3.5MM R/A" CUI_SJ1-3535NS 44.31,17.011 r180 top
J200 "CONN HEADER SMD R/A 3POS 1.25MM" CONN_505567_03_MOL 2.21,12.04 r270 bottom
J201 "CONN RCPT USB2.0 TYPE C 16+8POS" GCT_USB4085-GF-A_REVA4 26.467,1.854 r0 top
J400 "CONN FFC BOTTOM 50POS 0.5MM R/A" AMPHENOL_F32D-1A7Y1-21050 2.381,24.123 r270 top
J401 "CONN MICROSD CARD R/A SMD" CUI_MSD-1-A 7.314,37.209 r90 bottom
L200 "FIXED IND 6.8UH 4A 74.1 MOHM SMD" IND_SRP4030FA 28.27,51.918 r90 top
L201 "FIXED IND 22UH 300MA 810 MOHM" IND_LQW32FT220M2HL 28.905,52.984 r0 bottom
L202 "FIXED IND 22UH 300MA 810 MOHM" IND_LQW32FT220M2HL 25.298,46.787 r270 bottom
L203 "FIXED IND 1UH 2A 96 MOHM SMD" IND_TFM141206BLE 14.453,9.474 r180 bottom
L204 "FIXED IND 18UH 4.5A 62.5 MOHM" IND_XGL5050 16.688,51.384 r180 top
L300 "FIXED IND 2NH 1A 50 MOHM SMD" IND_MHQ100507 27.325,22.757 r0 top
L301 "FIXED IND 24NH 250MA 700 MOHM" IND_MHQ100507 24.435,19.71 r180 top
Q400 "MOSFET N-CH 60V 115MA SOT23" SOT-23_MCC 15.57,31.928 r90 top
R100 "RES SMD 499 OHM 0.1% 1/16W 0402" RESC1005X40N 37.735,37.512 r270 bottom
R101 "RES SMD 499 OHM 0.1% 1/16W 0402" RESC1005X40N 46.536,38.04 r270 bottom
R102 "RES SMD 499 OHM 0.1% 1/16W 0402" RESC1005X40N 45.279,38.841 r270 bottom
R103 "RES SMD 499 OHM 0.1% 1/16W 0402" RESC1005X40N 54.156,39.513 r270 bottom
R104 "RES 22 OHM 1% 1/16W 0402" RESC1005X40N 36.22,35.077 r90 top
R105 "RES 22 OHM 1% 1/16W 0402" RESC1005X40N 35.255,35.069 r270 top
R106 "RES SMD 10K OHM 1% 1/16W 0402" RESC1005X40N 39.446,32.529 r270 top
R107 "RES SMD 10K OHM 1% 1/16W 0402" RESC1005X40N 34.188,30.302 r180 top
R108 "RES SMD 49.9KOHM 0.1% 1/16W 0402" RESC1005X40N 47.676,18.339 r0 bottom
R111 "RES SMD 10K OHM 1% 1/16W 0402" RESC1005X40N 29.82,39.675 r0 bottom
R112 "RES SMD 10K OHM 1% 1/16W 0402" RESC1005X40N 26.687,38.938 r180 bottom
R113 "RES SMD 10K OHM 1% 1/16W 0402" RESC1005X40N 23.647,40.081 r315 top
R114 "RES SMD 220 OHM 0.1% 1/16W 0402" RESC1005X40N 40.818,28.854 r270 bottom
R115 "RES SMD 220 OHM 0.1% 1/16W 0402" RESC1005X40N 49.231,29.921 r180 bottom
R116 "RES SMD 499 OHM 0.1% 1/16W 0402" RESC1005X40N 51.195,29.032 r180 bottom
R117 "RES SMD 499 OHM 0.1% 1/16W 0402" RESC1005X40N 44.145,19.075 r270 bottom
R118 "RES SMD 100K OHM 0.1% 1/16W 0402" RESC1005X40N 27.686,12.675 r180 bottom
R119 "RES SMD 10K OHM 1% 1/16W 0402" RESC1005X40N 38.684,13.36 r270 bottom
R120 "RES SMD 681 OHM 0.1% 1/16W 0402" RESC1005X40N 49.214,30.886 r180 bottom
R121 "RES SMD 499 OHM 0.1% 1/16W 0402" RESC1005X40N 39.333,30.328 r0 bottom
R122 "RES SMD 681 OHM 0.1% 1/16W 0402" RESC1005X40N 41.275,30.302 r0 bottom
R123 "RES SMD 499 OHM 0.1% 1/16W 0402" RESC1005X40N 49.174,35.992 r0 bottom
R124 "RES SMD 681 OHM 0.1% 1/16W 0402" RESC1005X40N 49.176,32.233 r180 bottom
R125 "RES SMD 4.7 OHM 0.1% 1/16W 0402" RESC1005X40N 45.72,18.339 r180 bottom
R126 "RES SMD 220 OHM 0.1% 1/16W 0402" RESC1005X40N 50.317,33.172 r180 bottom
R127 "RES SMD 4.7 OHM 0.1% 1/16W 0402" RESC1005X40N 49.872,18.44 r0 bottom
R128 "RES SMD 54.9KOHM 0.1% 1/16W 0402" RESC1005X40N 49.403,17.297 r180 bottom
R129 "RES SMD 10K OHM 1% 1/16W 0402" RESC1005X40N 51.706,13.081 r180 bottom
R131 "RES SMD 499 OHM 0.1% 1/16W 0402" RESC1005X40N 41.3,35.23 r180 bottom
R132 "RES SMD 681 OHM 0.1% 1/16W 0402" RESC1005X40N 41.261,31.496 r0 bottom
R133 "RES SMD 220 OHM 0.1% 1/16W 0402" RESC1005X40N 40.132,32.461 r0 bottom
R134 "RES SMD 499 OHM 0.1% 1/16W 0402" RESC1005X40N 51.32,18.948 r270 bottom
R135 "RES SMD 10K OHM 1% 1/16W 0402" RESC1005X40N 32.944,35.687 r270 bottom
R200 "RES 220K OHM 0.1% 1/16W 0402" RESC1005X40N 30.683,46.042 r90 top
R201 "RES SMD 309K OHM 0.1% 1/16W 0402" RESC1005X40N 29.972,46.109 r270 bottom
R202 "RES SMD 274K OHM 0.5% 1/10W 0603" 0603_Yageo_Res 19.939,4.953 r180 bottom
R203 "RES SMD 54.9KOHM 0.1% 1/16W 0402" RESC1005X40N 30.269,42.621 r180 top
R204 "RES SMD 100K OHM 0.1% 1/16W 0402" RESC1005X40N 28.473,46.584 r0 bottom
R205 "RES SMD 100K OHM 0.1% 1/16W 0402" RESC1005X40N 18.415,3.607 r90 bottom
R206 "RES SMD 1K OHM 0.1% 1/16W 0402" RESC1005X40N 8.255,1.27 r180 bottom
R207 "RES SMD 49.9KOHM 0.1% 1/16W 0402" RESC1005X40N 31.183,48.59 r180 top
R208 "RES SMD 10K OHM 1% 1/16W 0402" RESC1005X40N 23.089,36.322 r180 bottom
R209 "RES SMD 10K OHM 1% 1/16W 0402" RESC1005X40N 20.21,1.727 r0 top
R210 "RES SMD 10K OHM 1% 1/16W 0402" RESC1005X40N 15.215,15.705 r90 top
R211 "RES SMD 10K OHM 1% 1/16W 0402" RESC1005X40N 23.071,37.313 r180 bottom
R212 "RES SMD 100K OHM 0.1% 1/16W 0402" RESC1005X40N 31.648,46.83 r270 top
R213 "RES SMD 15K OHM 0.1% 1/16W 0402" RESC1005X40N 31.623,44.907 r90 top
R214 "RES 5K OHM 1% 1/16W 0402" RESC1005X40N 16.434,2.929 r90 bottom
R215 "RES SMD 9.88KOHM 0.5% 1/16W 0402" RESC1005X40N 10.541,4.894 r90 bottom
R216 "RES SMD 10K OHM 1% 1/16W 0402" RESC1005X40N 13.792,0.711 r0 top
R217 "RES 270 OHM 1% 1/10W 0603" 0603_Yageo_Res 17.17,4.14 r180 top
R218 "RES 500 OHM 0.1% 1/10W 0603" 0603_Yageo_Res 7.696,5.131 r270 bottom
R219 "RES 88.7K OHM 1% 1/16W 0402" RESC1005X40N 40.945,48.768 r180 bottom
R220 "RES SMD 135K OHM 0.1% 1/10W 0603" RESC1608X55N 43.663,49.047 r0 bottom
R221 "RES SMD 10K OHM 1% 1/16W 0402" RESC1005X40N 19.152,0.737 r180 top
R222 "RES 909K OHM 1% 1/16W 0402" RESC1005X40N 41.351,19.634 r270 top
R223 "RES SMD 10K OHM 1% 1/16W 0402" RESC1005X40N 34.366,21.692 r180 top
R224 "RES SMD 15K OHM 0.1% 1/16W 0402" RESC1005X40N 43.155,50.292 r180 bottom
R225 "RES SMD 90.9KOHM 0.1% 1/16W 0402" RESC1005X40N 36.678,22.733 r180 top
R226 "RES SMD 49.9KOHM 0.1% 1/16W 0402" RESC1005X40N 40.945,49.733 r0 bottom
R227 "RES 0.5 OHM 1% 1/4W 0805" RES-PYU-PE 20.65,12.249 r270 bottom
R228 "RES SMD 100K OHM 0.1% 1/16W 0402" RESC1005X40N 40.869,21.082 r0 top
R229 "RES SMD 1K OHM 0.1% 1/16W 0402" RESC1005X40N 39.294,20.549 r90 top
R230 "RES SMD 15.4KOHM 0.1% 1/16W 0402" RESC1005X40N 44.171,47.227 r90 bottom
R231 "RES SMD 49.9KOHM 0.1% 1/16W 0402" RESC1005X40N 37.186,21.217 r90 top
R232 "RES SMD 33.2KOHM 0.1% 1/16W 0402" RESC1005X40N 43.205,42.748 r180 bottom
R233 "RES SMD 33.2KOHM 0.1% 1/16W 0402" RESC1005X40N 43.917,21.971 r90 top
R234 "RES SMD 5.1K OHM 0.1% 1/16W 0402" RESC1005X35N 28.372,3.124 r90 bottom
R235 "RES SMD 5.1K OHM 0.1% 1/16W 0402" RESC1005X35N 23.19,7.899 r270 top
R236 "RES 172K OHM 0.1% 1/10W 0603" RESC1608X55N 19.671,39.599 r0 top
R237 "RES SMD 54.9KOHM 0.1% 1/16W 0402" RESC1005X40N 20.117,45.136 r270 top
R238 "RES SMD 49.9KOHM 0.1% 1/16W 0402" RESC1005X40N 19.101,43.155 r270 top
R239 "RES SMD 100K OHM 0.1% 1/16W 0402" RESC1005X40N 19.609,47.422 r180 top
R240 "RES SMD 100K OHM 0.1% 1/16W 0402" RESC1005X40N 19.406,38.43 r180 top
R241 "RES SMD 100K OHM 0.1% 1/16W 0402" RESC1005X40N 21.387,33.52 r90 top
R242 "RES SMD 10K OHM 1% 1/16W 0402" RESC1005X40N 34.417,50.648 r180 top
R243 "RES 909K OHM 1% 1/16W 0402" RESC1005X40N 41.23,52.798 r0 top
R244 "RES SMD 90.9KOHM 0.1% 1/16W 0402" RESC1005X40N 45.667,50.004 r0 top
R245 "RES SMD 100K OHM 0.1% 1/16W 0402" RESC1005X40N 41.222,51.782 r180 top
R246 "RES SMD 1K OHM 0.1% 1/16W 0402" RESC1005X40N 43.27,51.782 r0 top
R247 "RES SMD 49.9KOHM 0.1% 1/16W 0402" RESC1005X40N 45.167,51.52 r270 top
R248 "RES SMD 33.2KOHM 0.1% 1/16W 0402" RESC1005X40N 38.283,50.512 r270 top
R249 "RES SMD 1K OHM 0.1% 1/16W 0402" RESC1005X40N 28.042,43.129 r180 bottom
R250 "RES SMD 1K OHM 0.1% 1/16W 0402" RESC1005X40N 23.012,50.3 r270 top
R251 "RES SMD 1K OHM 0.1% 1/16W 0402" RESC1005X40N 45.39,22.809 r90 top
R252 "RES SMD 1K OHM 0.1% 1/16W 0402" RESC1005X40N 49.994,46.101 r270 bottom
R253 "RES SMD 1K OHM 0.1% 1/16W 0402" RESC1005X40N 2.007,43.129 r0 top
R300 "RES SMD 10K OHM 1% 1/16W 0402" RESC1005X40N 20.828,14.072 r180 top
R301 "RES SMD 10K OHM 1% 1/16W 0402" RESC1005X40N 22.665,20.117 r180 bottom
R302 "RES SMD 1K OHM 0.1% 1/16W 0402" RESC1005X40N 30.556,14.148 r180 top
R303 "RES 22 OHM 1% 1/16W 0402" RESC1005X40N 15.164,20.777 r45 top
R304 "RES 22 OHM 1% 1/16W 0402" RESC1005X40N 20.447,29.642 r90 top
R305 "RES 22 OHM 1% 1/16W 0402" RESC1005X40N 17.094,19.05 r45 top
R306 "RES 22 OHM 1% 1/16W 0402" RESC1005X40N 19.507,29.642 r90 top
R307 "RES 22 OHM 1% 1/16W 0402" RESC1005X40N 12.675,25.375 r0 top
R308 "RES SMD 1M OHM 0.1% 1/16W 0402" RESC1005X40N 19.896,35.179 r0 top
R400 "RES SMD 10K OHM 1% 1/16W 0402" RESC1005X40N 35.476,1.803 r180 bottom
R401 "RES SMD 10K OHM 1% 1/16W 0402" RESC1005X40N 2.642,27.711 r0 bottom
R402 "RES SMD 10K OHM 1% 1/16W 0402" RESC1005X40N 6.071,40.843 r180 top
R403 "RES SMD 10K OHM 1% 1/16W 0402" RESC1005X40N 7.214,32.995 r270 top
R404 "RES SMD 10K OHM 1% 1/16W 0402" RESC1005X40N 18.39,50.444 r180 bottom
R405 "RES SMD 10K OHM 1% 1/16W 0402" RESC1005X40N 38.837,3.175 r90 bottom
R406 "RES SMD 10K OHM 1% 1/16W 0402" RESC1005X40N 14.105,50.419 r180 bottom
R407 "RES SMD 10K OHM 1% 1/16W 0402" RESC1005X40N 40.284,3.378 r180 bottom
R408 "RES SMD 10K OHM 1% 1/16W 0402" RESC1005X40N 44.806,1.727 r180 bottom
R412 "RES SMD 10K OHM 1% 1/16W 0402" RESC1005X40N 43.028,5.918 r180 bottom
R413 "RES SMD 10K OHM 1% 1/16W 0402" RESC1005X40N 8.357,18.44 r180 top
R414 "RES SMD 10K OHM 1% 1/16W 0402" RESC1005X40N 18.466,39.878 r90 bottom
R415 "RES SMD 10K OHM 1% 1/16W 0402" RESC1005X40N 18.364,30.107 r270 bottom
R416 "RES SMD 10K OHM 1% 1/16W 0402" RESC1005X40N 17.501,39.87 r90 bottom
R417 "RES SMD 10K OHM 1% 1/16W 0402" RESC1005X40N 16.51,39.878 r90 bottom
R418 "RES SMD 10K OHM 1% 1/16W 0402" RESC1005X40N 17.374,30.132 r270 bottom
R419 "RES SMD 10K OHM 1% 1/16W 0402" RESC1005X40N 16.408,30.124 r90 bottom
R420 "RES SMD 100K OHM 0.1% 1/16W 0402" RESC1005X40N 9.982,32.004 r90 top
R421 "RES SMD 100K OHM 0.1% 1/16W 0402" RESC1005X40N 10.947,31.996 r90 top
R422 "RES SMD 10K OHM 1% 1/16W 0402" RESC1005X40N 9.017,32.004 r90 top
R423 "RES 32.4K OHM 1% 1/16W 0402" RESC1005X40N 12.675,31.75 r180 top
R424 "RES SMD 100K OHM 0.1% 1/16W 0402" RESC1005X40N 12.7,30.759 r180 top
R425 "RES SMD 100K OHM 0.1% 1/16W 0402" RESC1005X40N 17.983,31.064 r270 top
SW300 "SWITCH TACTILE SPST-NO 0.05A 16V" SW_PTS810_SJM_250_SMTR_LFS 21.666,11.582 r180 top
SW301 "SWITCH TACTILE SPST-NO 0.05A 16V" SW_PTS810_SJM_250_SMTR_LFS 31.496,11.709 r0 top
SW400 "SWITCH TACTILE SPST-NO 0.05A 12V" SW_TL1014BF220QG 20.904,52.705 r0 bottom
SW401 "SWITCH TACTILE SPST-NO 0.05A 12V" SW_TL1014BF220QG 2.337,23.546 r90 bottom
SW402 "SWITCH TACTILE SPST-NO 0.05A 12V" SW_TL1014BF220QG 10.947,52.73 r0 bottom
U100 "IC OP AMP 2CH 8-SON" SON50P300X300X80-9N200X120 41.422,38.677 r0 bottom
U101 "IC OP AMP 2CH 8-SON" SON50P300X300X80-9N200X120 50.35,39.491 r0 bottom
U102 "IC OP AMP 2CH 8-SON" SON50P300X300X80-9N200X120 45.4,30.755 r0 bottom
U103 "IC OP AMP 2CH 10-VSON" IC_OPA1622IDRCR 47.804,22.073 r270 bottom
U200 "IC REG BUCK BST ADJ 600MA 10MSOP" SOP50P490X110-10N 28.524,46.558 r270 top
U201 "IC REG CUK ADJ 250MA TSOT23-6" TSOT-23_S6 28.981,48.692 r180 bottom
U202 "IC BATT CHG LI-ION 1CELL 24VQFN" QFN50P400X400X100-25N 14.478,6.02 r90 bottom
U203 "IC REG LIN NEG ADJ 200MA 12-DFN" 05-08-1725_ADI 41.83,46.417 r270 bottom
U204 "IC REG LIN POS ADJ 200MA 10DFN" VREG_LT3042EDD#PBF 39.98,23.241 r0 top
U205 "IC REG BUCK BST ADJ 600MA 10MSOP" SOP50P490X110-10N 16.942,45.39 r270 top
U206 "IC REG LIN POS ADJ 200MA 10DFN" VREG_LT3042EDD#PBF 41.992,49.496 r180 top
U300 "IC FLASH 64MBIT SPI/QUAD 8WSON" SON127P600X500X80-9N 11.684,23.571 r0 bottom
U301 "ESP32-S3" IC_ESP32-S3 21.584,24.603 r180 top
U400 "IC LED DRIVER RGLTR 30MA 16VQFN" VQFN016V3030_ROM 9.652,35.408 r90 top
Y100 "XTAL OSC XO 22.5792MHZ CMOS SMD" OSC_ECS-2520MVLC-225.792-CN-TR 37.758,32.599 r90 top
Y101 "XTAL OSC TCXO 24.5760MHZ HCMOS" XTAL_ASTX-H11-24.576MHZ-T 34.392,32.487 r0 top

## Footprints (in the part's own frame and the unit in brackets; to place one, negate y for a bottom-side part, rotate by r counter-clockwise, add the part's x,y. Pads: shape width x height; smd on the part's side, far side on the other; paste and mask are expansions set on the pad)
05-08-1725_ADI [mm]
  rrect12% 0.7x0.25 smd paste+0 mask+0.05: 1(-1.445,1.125) 2(-1.445,0.675) 3(-1.445,0.225) 4(-1.445,-0.225) 5(-1.445,-0.675) 6(-1.445,-1.125) 7(1.445,-1.125) 8(1.445,-0.675) 9(1.445,-0.225) 10(1.445,0.225) 11(1.445,0.675) 12(1.445,1.125)
  rrect12% 1.65x2.38 smd paste+0 mask+0.05: 13(0,0)
  silkscreen extent -1.68,-1.68 1.68,1.68, body extent -1.55,-1.55 1.55,1.55, height 0.81
0603_Yageo_Res [mm]
  rrect12% 0.9x0.8 smd mask+0.05: 1(0.85,0) 2(-0.85,0)
  silkscreen extent -1.43,-0.5 1.43,0.5, body extent -0.8,-0.4 0.8,0.4, height 0.55
AMPHENOL_F32D-1A7Y1-21050 [mm]
  rect 0.25x1.3 smd paste+0 mask+0.05: 1(-12.25,3.08) 2(-11.75,3.08) 3(-11.25,3.08) 4(-10.75,3.08) 5(-10.25,3.08) 6(-9.75,3.08) 7(-9.25,3.08) 8(-8.75,3.08) 9(-8.25,3.08) 10(-7.75,3.08) 11(-7.25,3.08) 12(-6.75,3.08) 13(-6.25,3.08) 14(-5.75,3.08) 15(-5.25,3.08) 16(-4.75,3.08) 17(-4.25,3.08) 18(-3.75,3.08) 19(-3.25,3.08) 20(-2.75,3.08) 21(-2.25,3.08) 22(-1.75,3.08) 23(-1.25,3.08) 24(-0.75,3.08) 25(-0.25,3.08) 26(0.25,3.08) 27(0.75,3.08) 28(1.25,3.08) 29(1.75,3.08) 30(2.25,3.08) 31(2.75,3.08) 32(3.25,3.08) 33(3.75,3.08) 34(4.25,3.08) 35(4.75,3.08) 36(5.25,3.08) 37(5.75,3.08) 38(6.25,3.08) 39(6.75,3.08) 40(7.25,3.08) 41(7.75,3.08) 42(8.25,3.08) 43(8.75,3.08) 44(9.25,3.08) 45(9.75,3.08) 46(10.25,3.08) 47(10.75,3.08) 48(11.25,3.08) 49(11.75,3.08) 50(12.25,3.08)
  rect 1.73x2.8 smd paste+0 mask+0.05: S1(-14.19,0) S2(14.19,0)
  silkscreen extent -14.25,-2.05 14.25,4.75, body extent -14.55,-1.64 14.55,3.68, height 3.15
CAP_298D225X0016M2T [mm]
  rrect12% 0.7x0.61 smd mask+0.05: 1(-0.67,0) 2(0.67,0)
  silkscreen extent -1.15,-0.55 1.15,0.55, body extent -0.8,-0.43 0.8,0.43, height 0.9
CAP_MUR_0805 [mm]
  rect 0.7x1.3 smd mask+0.05: 1(0.95,0) 2(-0.95,0)
  silkscreen extent -1.5,-0.85 1.5,0.85, body extent -1,-0.63 1,0.63, height 0.95
CAPC1005X55N [mm]
  rrect12% 0.54x0.6 smd paste+0 mask+0.102: 1(-0.43,0) 2(0.43,0)
  silkscreen extent -0.85,-0.54 0.85,0.54, body extent -0.5,-0.25 0.5,0.25, height 0.55
CAPC1005X60N [mm]
  rrect12% 0.425x0.6 smd mask+0.05: 1(-0.425,0) 2(0.425,0)
  silkscreen extent -0.78,-0.43 0.78,0.43, body extent -0.5,-0.25 0.5,0.25, height 0.6
CAPC1608X100N [mm]
  rrect12% 0.9x0.8 smd mask+0.05: 1(0.8,0) 2(-0.8,0)
  silkscreen extent -1.4,-0.55 1.4,0.55, body extent -0.8,-0.4 0.8,0.4, height 1
CAPC2012X140N [mm]
  rrect12% 1x1.1 smd mask+0.05: 1(-1.1,0) 2(1.1,0)
  silkscreen extent -1.75,-0.75 1.75,0.75, body extent -1,-0.63 1,0.63, height 1.4
CAPC3225X270N [mm]
  rrect12% 1.53x2.72 smd mask+0.05: 1(-1.341,0) 2(1.341,0)
  silkscreen extent -2.25,-1.5 2.25,1.5, body extent -1.6,-1.25 1.6,1.25, height 2.7
CONN_505567_03_MOL [mil]
  rect 33x51 smd paste+0 mask+4.02: 1(49.21,-69.07) 2(0,-69.07) 3(-49.21,-69.07)
  rect 55x89 smd paste+0 mask+4.02: 4(-124.02,21.28) 5(124.02,21.28)
  silkscreen extent -143,-87 143,88, body extent -138,-83 138,82, height 153
CRYST_ECS-400 [mm]
  rrect12% 0.85x0.75 smd mask+0.05: 1(-0.675,0.525) 2(0.675,0.525) 3(0.675,-0.525) 4(-0.675,-0.525)
  silkscreen extent -1.25,-1.1 1.25,1.1, body extent -1,-0.8 1,0.8, height 0.5
CUI_MSD-1-A [mm]
  rect 0.7x1.6 smd mask+0.102: 1(2.25,7.75) 2(1.15,7.75) 3(0.05,7.75) 4(-1.05,7.75) 5(-2.15,7.75) 6(-3.25,7.75) 7(-4.35,7.75) 8(-5.45,7.75) CD(-6.55,7.75)
  rect 1.2x1.8 smd mask+0.102: G1(-7.75,6.45)
  rect 1.6x1.5 smd mask+0.102: G2(6.85,6.7)
  rect 1.2x2.2 smd mask+0.102: G3(-7.75,-2.85) G4(7.75,-2.85)
  round 1 hole 1 unplated: ""(-4.95,-3.25) ""(3.05,-3.25)
  silkscreen extent -7.42,-7.25 7.42,7.25, body extent -8.12,-7.32 8.03,7.73, height 1.85
CUI_SJ1-3535NS [mm]
  oval 1.4x2.8 hole 1 slot 2 at 90 deg: 1(-9.144,4.064) 2(-6.744,6.064) 3(-1.244,6.064) 4(2.456,4.064) 5(-3.044,4.064)
  oval 2.8x1.4 hole 1 slot 2 at 0 deg: SH1(-8.144,-0.236) SH2(0.756,-0.236) SH3(0.756,8.464)
  silkscreen extent -10.64,-0.74 4.06,9.91, body extent -14.26,-0.68 4.1,9.02, height 12.65
DIOM5226X230N [mm]
  rrect25% 2.33x1.55 smd: A(-2.135,0) C(2.135,0)
  silkscreen extent -4.4,-1.3 2.15,1.3, body extent -2.6,-1.3 2.6,1.3, height 2.4
EN12-VS_TTE [mil]
  round 59 hole 39 paste-99999 mask+0: 1(-196.85,-344) 2(-98.43,-344) 3(0,-344) 4(-196.85,-245.57) 5(0,-245.57)
  rrect50% 157.48x157.48 hole 118.11 paste-99999 mask-39.5: 6(153.57,-206.25) 7(-350.43,-206.25)
  silkscreen extent -347,-413 151,-114, body extent -345,-902 150,-114, height 771
GCT_USB4085-GF-A_REVA4 [mm]
  round 0.65 hole 0.4: A1(-2.975,4.36) A4(-2.125,4.36) A5(-1.275,4.36) A6(-0.425,4.36) A7(0.425,4.36) A8(1.275,4.36) A9(2.125,4.36) A12(2.975,4.36) B1(2.975,3.01) B4(2.125,3.01) B5(1.275,3.01) B6(0.425,3.01) B7(-0.425,3.01) B8(-1.275,3.01) B9(-2.125,3.01) B12(-2.975,3.01)
  oval 0.9x1.7 hole 0.6 slot 1.4 at 90 deg: S1(-4.325,0) S2(4.325,0)
  oval 0.9x2.4 hole 0.6 slot 2.1 at 90 deg: S3(-4.325,3.38) S4(4.325,3.38)
  silkscreen extent -4.47,-1.74 4.47,1.85, body extent -4.47,-4.25 4.47,4.92, height 3.46
IC_ESD122DMXR [mm]
  rrect50% 0.2x0.2 smd paste+0 mask+0.05: 1(-0.15,0) 2(0.15,-0.34) 3(0.15,0.34)
  silkscreen extent -0.75,-0.55 0.35,0.55, body extent -0.3,-0.5 0.3,0.5, height 0.4
IC_ESP32-S3 [mm]
  rect 0.65x0.22 smd mask+0.05: 1(-3.425,2.6) 2(-3.425,2.2) 3(-3.425,1.8) 4(-3.425,1.4) 5(-3.425,1) 6(-3.425,0.6) 7(-3.425,0.2) 8(-3.425,-0.2) 9(-3.425,-0.6) 10(-3.425,-1) 11(-3.425,-1.4) 12(-3.425,-1.8) 13(-3.425,-2.2) 14(-3.425,-2.6) 29(3.425,-2.6) 30(3.425,-2.2) 31(3.425,-1.8) 32(3.425,-1.4) 33(3.425,-1) 34(3.425,-0.6) 35(3.425,-0.2) 36(3.425,0.2) 37(3.425,0.6) 38(3.425,1) 39(3.425,1.4) 40(3.425,1.8) 41(3.425,2.2) 42(3.425,2.6)
  rect 0.22x0.65 smd mask+0.05: 15(-2.6,-3.425) 16(-2.2,-3.425) 17(-1.8,-3.425) 18(-1.4,-3.425) 19(-1,-3.425) 20(-0.6,-3.425) 21(-0.2,-3.425) 22(0.2,-3.425) 23(0.6,-3.425) 24(1,-3.425) 25(1.4,-3.425) 26(1.8,-3.425) 27(2.2,-3.425) 28(2.6,-3.425) 43(2.6,3.425) 44(2.2,3.425) 45(1.8,3.425) 46(1.4,3.425) 47(1,3.425) 48(0.6,3.425) 49(0.2,3.425) 50(-0.2,3.425) 51(-0.6,3.425) 52(-1,3.425) 53(-1.4,3.425) 54(-1.8,3.425) 55(-2.2,3.425) 56(-2.6,3.425)
  round 0.5 hole 0.4 mask+0: 57(-1.5,0.75) 57(-1.5,-0.75) 57(-0.75,1.5) 57(-0.75,0) 57(-0.75,-1.5) 57(0,0.75) 57(0,-0.75) 57(0.75,1.5) 57(0.75,0) 57(0.75,-1.5) 57(1.5,0.75) 57(1.5,-0.75)
  rect 4.1x4.1 smd paste-1.55: 57(0,0)
  silkscreen extent -3.5,-3.5 3.5,3.5, body extent -3.5,-3.5 3.5,3.5, height 0.9
IC_OPA1622IDRCR [mm]
  rrect25% 0.6x0.24 smd mask+0.07: 1(-1.4,1) 2(-1.4,0.5) 3(-1.4,0) 4(-1.4,-0.5) 5(-1.4,-1) 6(1.4,-1) 7(1.4,-0.5) 8(1.4,0) 9(1.4,0.5) 10(1.4,1)
  round 0.3 hole 0.2 mask+0: 11(-0.575,0) 11(0,-0.95) 11(0,0.95) 11(0.575,0)
  round 0.025 smd paste+0 mask+0.07: 11(0,0)
  L1 (SIG/PWR) region: 0.375,1.2 0.825,1.2 0.825,-1.2 0.375,-1.2 0.375,-1.7 0.125,-1.7 0.125,-1.2 -0.125,-1.2 -0.125,-1.7 -0.375,-1.7 -0.375,-1.2 -0.825,-1.2 -0.825,1.2 -0.375,1.2 -0.375,1.7 -0.125,1.7 -0.125,1.2 0.125,1.2 0.125,1.7 0.375,1.7
  silkscreen extent -1.5,-1.5 1.5,1.5, body extent -1.5,-1.5 1.5,1.5, height 1
IND_LQW32FT220M2HL [mm]
  rrect12% 0.9x2.5 smd mask+0.05: 1(-1.55,0) 2(1.55,0)
  silkscreen extent -2.28,-1.48 2.28,1.48
IND_MHQ100507 [mm]
  rrect12% 0.5x0.5 smd paste+0 mask+0.05: 1(-0.45,0) 2(0.45,0)
  silkscreen extent -0.85,-0.4 0.85,0.4
IND_SRP4030FA [mm]
  rect 3.8x1.1 smd paste+0 mask+0.1: 1(0,-1.25) 2(0,1.25)
  silkscreen extent -2.25,-2.25 2.25,2.25, body extent -2.05,-2.05 2.05,2.05, height 2.86
IND_TFM141206BLE [mm]
  rrect12% 0.625x1.3 smd mask+0.05: 1(-0.7,0) 2(0.7,0)
  silkscreen extent -1.18,-0.8 1.18,0.8
IND_XGL5050 [mm]
  rrect12% 1.18x4.7 smd mask+0.05: 1(-1.655,0) 2(1.655,0)
  silkscreen extent -2.75,-2.88 2.75,2.88, body extent -2.74,-2.84 2.74,2.84, height 5.15
LEDM1608X80 [mm]
  rect 0.8x0.8 smd: A(0.75,0) C(-0.75,0)
  silkscreen extent -1.37,-0.58 1.37,0.61, body extent -0.8,-0.4 0.8,0.4, height 0.8
OSC_ECS-2520MVLC-225.792-CN-TR [mm]
  rect 0.9x0.8 smd mask+0.05: 1(-0.925,-0.725) 2(0.925,-0.725) 3(0.925,0.725) 4(-0.925,0.725)
  silkscreen extent -0.22,-1 0.22,1, body extent -1.25,-1 1.25,1, height 0.9
QFN40P300X500X80-31N-D [mm]
  rrect12% 0.75x0.2 smd mask+0.05: 1(-1.5,1.8) 2(-1.5,1.4) 3(-1.5,1) 4(-1.5,0.6) 5(-1.5,0.2) 6(-1.5,-0.2) 7(-1.5,-0.6) 8(-1.5,-1) 9(-1.5,-1.4) 10(-1.5,-1.8) 16(1.5,-1.8) 17(1.5,-1.4) 18(1.5,-1) 19(1.5,-0.6) 20(1.5,-0.2) 21(1.5,0.2) 22(1.5,0.6) 23(1.5,1) 24(1.5,1.4) 25(1.5,1.8)
  rrect12% 0.2x0.75 smd mask+0.05: 11(-0.8,-2.5) 12(-0.4,-2.5) 13(0,-2.5) 14(0.4,-2.5) 15(0.8,-2.5) 26(0.8,2.5) 27(0.4,2.5) 28(0,2.5) 29(-0.4,2.5) 30(-0.8,2.5)
  rrect12% 1.8x3.8 smd mask+0.05: 31(0,0)
  silkscreen extent -1.97,2.3 -1.78,2.5, body extent -1.55,-2.55 1.55,2.55, height 0.8
QFN50P400X400X100-25N [mm]
  rrect40% 0.58x0.24 smd mask+0.07: 1(-1.935,1.25) 2(-1.935,0.75) 3(-1.935,0.25) 4(-1.935,-0.25) 5(-1.935,-0.75) 6(-1.935,-1.25) 13(1.935,-1.25) 14(1.935,-0.75) 15(1.935,-0.25) 16(1.935,0.25) 17(1.935,0.75) 18(1.935,1.25)
  rrect40% 0.24x0.58 smd mask+0.07: 7(-1.25,-1.935) 8(-0.75,-1.935) 9(-0.25,-1.935) 10(0.25,-1.935) 11(0.75,-1.935) 12(1.25,-1.935) 19(1.25,1.935) 20(0.75,1.935) 21(0.25,1.935) 22(-0.25,1.935) 23(-0.75,1.935) 24(-1.25,1.935)
  rrect3% 2.7x2.7 smd paste-0.45 mask+0.07: 25(0,0)
  silkscreen extent -3.07,-2 2,2, body extent -2,-2 2,2, height 1
RES-PYU-PE [mm]
  rrect12% 1.02x1.27 smd paste+0 mask+0.05: 1(-1.01,0) 2(1.01,0)
  silkscreen extent -1.63,-0.76 1.63,0.76
RESC1005X35N [mm]
  rrect12% 0.56x0.6 smd paste+0 mask+0.05: 1(-0.435,0) 2(0.435,0)
  silkscreen extent -0.82,-0.4 0.83,0.4, body extent -0.5,-0.25 0.5,0.25, height 0.35
RESC1005X40N [mm]
  rrect12% 0.5x0.6 smd mask+0.05: 1(-0.5,0) 2(0.5,0)
  silkscreen extent -0.9,-0.43 0.9,0.43, body extent -0.5,-0.25 0.5,0.25, height 0.4
RESC1608X55N [mm]
  rrect12% 0.9x0.8 smd paste+0 mask+0.102: 1(-0.85,0) 2(0.85,0)
  silkscreen extent -1.5,-0.6 1.5,0.6, body extent -0.8,-0.4 0.8,0.4, height 0.55
SON50P300X300X80-9N200X120 [mm]
  rrect40% 0.7x0.25 smd mask+0.07: 1(-1.35,0.75) 2(-1.35,0.25) 3(-1.35,-0.25) 4(-1.35,-0.75) 5(1.35,-0.75) 6(1.35,-0.25) 7(1.35,0.25) 8(1.35,0.75)
  rrect8% 1.2x2 smd paste+0 mask+0.07: 9(0,0)
  silkscreen extent -1.55,-1.55 1.55,1.55, body extent -1.5,-1.5 1.5,1.5, height 0.8
SON127P600X500X80-9N [mm]
  rrect12% 1x0.4 smd mask+0.05: 1(-3,-1.905) 2(-3,-0.635) 3(-3,0.635) 4(-3,1.905) 5(3,1.905) 6(3,0.635) 7(3,-0.635) 8(3,-1.905)
  rrect12% 3.5x4 smd mask+0.05: 9(0,0)
SOP50P490X110-10N [mm]
  rect 0.889x0.305 smd paste+0 mask+0.05: 1(-2.107,1) 2(-2.107,0.5) 3(-2.107,0) 4(-2.107,-0.5) 5(-2.107,-1) 6(2.107,-1) 7(2.107,-0.5) 8(2.107,0) 9(2.107,0.5) 10(2.107,1)
  silkscreen extent -1.5,-1.5 1.5,1.5, body extent -2.45,-1.5 2.45,1.5, height 1.1
SOT65P210X110-3N [mm]
  rrect25% 1.19x0.4 smd paste+0 mask+0.102: 1(-0.96,0.65) 2(-0.96,-0.65) 3(0.96,0)
  silkscreen extent -1.81,-1.25 1.81,1.25, body extent -1.05,-1 1.05,1, height 1.1
SOT-23_MCC [mm]
  rrect12% 0.8x0.9 smd paste+0 mask+0.102: 1(-0.95,-1) 2(0.95,-1) 3(0,1)
  silkscreen extent -1.75,-1.75 1.75,1.75, body extent -1.46,-1.18 1.46,1.18, height 1.22
SW_PTS810_SJM_250_SMTR_LFS [mm]
  rect 1.05x0.65 smd mask+0.05: 1(-2.075,1.075) 2(2.075,1.075) 3(-2.075,-1.075) 4(2.075,-1.075)
  silkscreen extent -3.2,-1.62 2.1,1.62, body extent -2.3,-1.6 2.3,1.6, height 2.7
SW_TL1014BF220QG [mm]
  rect 1.2x1 smd mask+0.05: 1(2.8,0.85) 2(2.8,-0.85) 3(-2.8,0.85) 4(-2.8,-0.85)
  body extent -3.2,-2.75 3.2,1.75, height 1.65
TSOT-23_S6 [mm]
  rrect12% 1.22x0.62 smd paste+0 mask+0.05: 1(-1.31,0.95) 2(-1.31,0) 3(-1.31,-0.95) 4(1.31,-0.95) 5(1.31,0) 6(1.31,0.95)
  body extent -1.4,-1.45 1.4,1.45, height 1
TVS_ARR_4UNI_FP [mm]
  rect 1x0.7 smd mask+0.05: 1(-1.2,0.95) 2(-1.2,0) 3(-1.2,-0.95) 4(1.2,-0.95) 5(1.2,0) 6(1.2,0.95)
  silkscreen extent -2.28,-1.65 1.9,1.65
VQFN016V3030_ROM [mil]
  rect 28x9.84 smd paste+0 mask+1.97: 1(-57,30) 2(-57,10) 3(-57,-10) 4(-57,-30) 9(57,-30) 10(57,-10) 11(57,10) 12(57,30)
  rect 9.84x28 smd paste+0 mask+1.97: 5(-30,-57) 6(-10,-57) 7(10,-57) 8(30,-57) 13(30,57) 14(10,57) 15(-10,57) 16(-30,57)
  rect 55.12x55.12 smd paste+0 mask+1.97: 17(0,0)
  silkscreen extent -100,-64 64,64, body extent -59,-59 59,59, height 39
VREG_LT3042EDD#PBF [mm]
  rrect12% 0.7x0.25 smd mask+0.05: 1(-1.425,1) 2(-1.425,0.5) 3(-1.425,0) 4(-1.425,-0.5) 5(-1.425,-1) 6(1.425,-1) 7(1.425,-0.5) 8(1.425,0) 9(1.425,0.5) 10(1.425,1)
  rrect12% 1.65x2.38 smd paste-2 mask+0.05: 11(0,0)
  silkscreen extent -1.5,-1.5 1.5,1.5, body extent -1.5,-1.5 1.5,1.5, height 0.8
WE-CBF_0805_W4.0 [mm]
  rrect12% 0.9x1 smd paste+0 mask+0.05: 1(-1.05,0) 2(1.05,0)
  silkscreen extent -1.6,-0.65 1.6,0.65, body extent -1,-0.6 1,0.6, height 0.95
XTAL_ASTX-H11-24.576MHZ-T [mm]
  rect 1.3x1.1 smd mask+0.05: 1(-1.15,-0.95) 2(1.15,-0.95) 3(1.15,0.95) 4(-1.15,0.95)
  silkscreen extent -1.65,-1.3 1.65,1.3, body extent -1.6,-1.25 1.6,1.25, height 1.01

## Part data
B100: library part #1-053, Manufacturer 1="ESS Technology", Manufacturer Part Number 1=ES9038Q2M, Mouser Part Number=460-ES9038Q2M, <Termination>=SMD, AL-PN=#1-053, Creator Project=DAP, Geometry.Height=0.8mm, Lead Time="9 Weeks", Manufacturer_Name="ESS Technology", Manufacturer_Part_Number=ES9038Q2M, Mouser Price/Stock=https://www.mouser.co.uk/ProductDetail/ESS-Technology/ES9038Q2M?qs=sPbYRqrBIVmdeUedURuuOw%3D%3D, PartType=IC, Status=Verified, SubType=DAC, Supplier 1=Mouser, Supplier Label="Audio D/A Converter ICs Sabre 32 Reference Stereo low power audiophile DAC w/DOP", Supplier Part Number 1=460-ES9038Q2M, Type=Standard
C100 C101 C106 C107 C124 C138: library part #1-106, <Rating>=50V, <Tolerance>=0.01, <Value>=1.5nF, Manufacturer 1="Murata Electronics", Manufacturer Part Number 1=GCM1885C1H152FA16D, Supplier Part Number 1=490-18206-1-ND, <Footprint>=0603, <Spec>=C0G, <Termination>=SMD, AL-PN=#1-106, Creator Project=DAP, Lead Time="21 Weeks", PartType=Capacitor, Status=Verified, SubType=Ceramic, Supplier 1=Digikey, Supplier Label="1500 pF ±1% 50V Ceramic Capacitor C0G, NP0 0603 (1608 Metric)", Type=Standard
C102 C105 C113 C115 C120 C121 C129 C135 C139 C200 C215 C301 C305 C309 C312 C410 C411 C412 C413: library part #1-132, <Rating>=25V, <Tolerance>=0.1, <Value>=1uF, Manufacturer 1="Murata Electronics", Manufacturer Part Number 1=GCM188R71E105KA64D, Supplier Part Number 1=490-10673-1-ND, <Footprint>=0603, <Spec>=X7R, <Termination>=SMD, AL-PN=#1-132, Creator Project=DAP, Lead Time="21 Weeks", PartType=Capacitor, Status=Verified, SubType=Ceramic, Supplier 1=Digikey, Supplier Label="1 µF ±10% 25V Ceramic Capacitor X7R 0603 (1608 Metric)", Type=Standard
C103 C104 C108 C109 C110 C111 C112 C114 C116 C119 C122 C125 C126 C128 C133 C134 C213 C230 C302 C303 C306 C307 C311 C400 C401 C402 C403 C407 C408: library part #1-080, <Rating>=50V, <Tolerance>=0.1, <Value>=0.1uF, Manufacturer 1="Murata Electronics", Manufacturer Part Number 1=GCM155R71H104KE02D, Supplier Part Number 1=490-10672-1-ND, <Footprint>=0402, <Spec>=X7R, <Termination>=SMD, AL-PN=#1-080, Creator Project=DAP, Lead Time="21 Weeks", PartType=Capacitor, Status=Verified, SubType=Ceramic, Supplier 1=Digikey, Supplier Label="0.1 µF ±10% 50V Ceramic Capacitor X7R 0402 (1005 Metric)", Type=Standard
C117: library part #1-103, <Rating>=6.3V, <Tolerance>=0.2, <Value>=4.7uF, Manufacturer 1="Murata Electronics", Manufacturer Part Number 1=GRM155R60J475ME47D, Supplier Part Number 1=490-5915-1-ND, <Footprint>=0402, <Termination>=SMD, AL-PN=#1-103, Creator Project=DAP, Lead Time="17 Weeks", PartType=Capacitor, Status=Verified, SubType=Ceramic, Supplier 1=Digikey, Supplier Label="4.7 µF ±20% 6.3V Ceramic Capacitor X5R 0402 (1005 Metric)", Type=Standard
C118 C123 C132 C137: library part #1-107, <Rating>=50V, <Tolerance>=0.02, <Value>=2.7nF, Manufacturer 1="Murata Electronics", Manufacturer Part Number 1=GRM1555C1H272GE01D, Supplier Part Number 1=490-GRM1555C1H272GE01DCT-ND, <Footprint>=0402, <Spec>=C0G, <Termination>=SMD, AL-PN=#1-107, Creator Project=DAP, Lead Time="17 Weeks", PartType=Capacitor, Status=Verified, SubType=Ceramic, Supplier 1=Digikey, Supplier Label="2700 pF ±2% 50V Ceramic Capacitor C0G, NP0 0402 (1005 Metric)", Type=Standard
C127 C130 C131 C136: library part #1-108, <Rating>=50V, <Tolerance>=0.05, <Value>=13nF, Manufacturer 1="Murata Electronics", Manufacturer Part Number 1=GRM2195C1H133JA01D, Supplier Part Number 1=490-12752-1-ND, <Footprint>=0805, <Spec>=C0G, <Termination>=SMD, AL-PN=#1-108, Creator Project=DAP, Lead Time="17 Weeks", PartType=Capacitor, Status=Verified, SubType=Ceramic, Supplier 1=Digikey, Supplier Label="0.013 µF ±5% 50V Ceramic Capacitor C0G, NP0 0805 (2012 Metric)", Type=Standard
C201 C202: library part #1-070, <Rating>=25V, <Tolerance>=0.1, <Value>=2.2uF, Manufacturer 1="Murata Electronics", Manufacturer Part Number 1=GRM188Z71E225KE43D, Supplier Part Number 1=490-GRM188Z71E225KE43DCT-ND, <Footprint>=0603, <Spec>=X7R, <Termination>=SMD, AL-PN=#1-070, Creator Project=DAP, Lead Time="17 Weeks", PartType=Capacitor, Status=Verified, SubType=Ceramic, Supplier 1=Digikey, Supplier Label="2.2 µF ±10% 25V Ceramic Capacitor X7R 0603 (1608 Metric)", Type=Standard
C203 C206 C211 C216 C217 C218 C220 C224 C231 C232 C304 C409: library part #1-081, <Rating>=10V, <Tolerance>=0.1, <Value>=10uF, Manufacturer 1="Murata Electronics", Manufacturer Part Number 1=GCM21BR71A106KE22K, Supplier Part Number 1=490-14531-1-ND, <Footprint>=0805, <Spec>=X7R, <Termination>=SMD, AL-PN=#1-081, Creator Project=DAP, Lead Time="21 Weeks", PartType=Capacitor, Status=Verified, SubType=Ceramic, Supplier 1=Digikey, Supplier Label="10 µF ±10% 10V Ceramic Capacitor X7R 0805 (2012 Metric)", Type=Standard
C204 C208 C209 C227 C228 C229: library part #1-073, <Rating>=25V, <Tolerance>=0.1, <Value>=22uF, Manufacturer 1="Murata Electronics", Manufacturer Part Number 1=GCM32EC71E226KE36L, Supplier Part Number 1=490-GCM32EC71E226KE36LCT-ND, <Footprint>=1210, <Spec>=X7S, <Termination>=SMD, AL-PN=#1-073, Creator Project=DAP, Lead Time="21 Weeks", PartType=Capacitor, Status=Verified, SubType=Ceramic, Supplier 1=Digikey, Supplier Label="22 µF ±10% 25V Ceramic Capacitor X7S 1210 (3225 Metric)", Type=Standard
C205: library part #1-093, <Rating>=50V, <Tolerance>=0.05, <Value>=22pF, Manufacturer 1="Murata Electronics", Manufacturer Part Number 1=GRM1555C1H220JA01D, Supplier Part Number 1=490-5868-1-ND, <Footprint>=0402, <Spec>=C0G, <Termination>=SMD, AL-PN=#1-093, Creator Project=DAP, Lead Time="17 Weeks", PartType=Capacitor, Status=Verified, SubType=Ceramic, Supplier 1=Digikey, Supplier Label="22 pF ±5% 50V Ceramic Capacitor C0G, NP0 0402 (1005 Metric)", Type=Standard
C207: library part #1-059, <Rating>=16V, <Tolerance>=0.1, <Value>=33nF, Manufacturer 1="Murata Electronics", Manufacturer Part Number 1=GRM155R71C333KA01D, Supplier Part Number 1=490-3257-1-ND, <Footprint>=0402, <Spec>=X7R, <Termination>=SMD, AL-PN=#1-059, Creator Project=DAP, Lead Time="17 Weeks", PartType=Capacitor, Status=Verified, SubType=Ceramic, Supplier 1=Digikey, Supplier Label="0.033 µF ±10% 16V Ceramic Capacitor X7R 0402 (1005 Metric)", Type=Standard
C210: library part #1-048, <Rating>=50V, <Tolerance>=0.1, <Value>=0.1uF, Manufacturer 1="Murata Electronics", Manufacturer Part Number 1=GRM155R71H104KE14D, Supplier Part Number 1=490-10700-1-ND, <Footprint>=0402, <Spec>=X7R, <Termination>=SMD, AL-PN=#1-048, Creator Project=aRTy, Lead Time="17 Weeks", PartType=Capacitor, Status=Verified, SubType=Ceramic, Supplier 1=Digikey, Supplier Label="0.1 µF ±10% 50V Ceramic Capacitor X7R 0402 (1005 Metric)", Type=Standard
C212 C226: library part #1-077, <Rating>=50V, <Tolerance>=0.02, <Value>=1.5nF, Manufacturer 1="Murata Electronics", Manufacturer Part Number 1=GRM1555C1H152GA01D, Supplier Part Number 1=490-GRM1555C1H152GA01DCT-ND, <Footprint>=0402, <Spec>=C0G, <Termination>=SMD, AL-PN=#1-077, Creator Project=DAP, Lead Time="17 Weeks", PartType=Capacitor, Status=Verified, SubType=Ceramic, Supplier 1=Digikey, Supplier Label="1500 pF ±2% 50V Ceramic Capacitor C0G, NP0 0402 (1005 Metric)", Type=Standard
C214: library part #1-092, <Rating>=35V, <Tolerance>=0.1, <Value>=1uF, Manufacturer 1="Murata Electronics", Manufacturer Part Number 1=GRM155R6YA105KE11D, Supplier Part Number 1=490-10019-1-ND, <Footprint>=0402, <Spec>=X5R, <Termination>=SMD, AL-PN=#1-092, Creator Project=DAP, Lead Time="17 Weeks", PartType=Capacitor, Status=Verified, SubType=Ceramic, Supplier 1=Digikey, Supplier Label="1 µF ±10% 35V Ceramic Capacitor X5R 0402 (1005 Metric)", Type=Standard
C219 C221: library part #1-071, <Rating>=16V, <Tolerance>=0.1, <Value>=4.7uF, Manufacturer 1="Murata Electronics", Manufacturer Part Number 1=GRM21BR71C475KE51L, Supplier Part Number 1=490-14466-1-ND, <Footprint>=0805, <Spec>=X7R, <Termination>=SMD, AL-PN=#1-071, Creator Project=DAP, Lead Time="17 Weeks", PartType=Capacitor, Status=Verified, SubType=Ceramic, Supplier 1=Digikey, Supplier Label="4.7 µF ±10% 16V Ceramic Capacitor X7R 0805 (2012 Metric)", Type=Standard
C222 C223 C233: library part #1-098, <Rating>=16V, <Tolerance>=0.2, <Value>=2.2uF, Manufacturer 1="Vishay Sprague", Manufacturer Part Number 1=298D225X0016M2T, Supplier Part Number 1=718-1613-1-ND, <Footprint>=0603, <Termination>=SMD, AL-PN=#1-098, Creator Project=DAP, Lead Time="23 Weeks", PartType=Capacitor, Status=Verified, SubType=Tantalum, Supplier 1=Digikey, Supplier Label="2.2 µF Molded Tantalum Capacitors 16 V 0603 (1608 Metric) 12Ohm", Type=Standard
C225: library part #1-096, <Rating>=50V, <Tolerance>=0.05, <Value>=100pF, Manufacturer 1="Murata Electronics", Manufacturer Part Number 1=GRM1555C1H101JA01D, Supplier Part Number 1=490-5922-1-ND, <Footprint>=0402, <Spec>=C0G, <Termination>=SMD, AL-PN=#1-096, Creator Project=DAP, Lead Time="17 Weeks", PartType=Capacitor, Status=Verified, SubType=Ceramic, Supplier 1=Digikey, Supplier Label="100 pF ±5% 50V Ceramic Capacitor C0G, NP0 0402 (1005 Metric)", Type=Standard
C300 C404 C405: library part #1-040, <Rating>=16V, <Tolerance>=0.1, <Value>=10nF, Manufacturer 1=YAGEO, Manufacturer Part Number 1=CC0402KRX7R7BB103, Supplier Part Number 1=311-1042-2-ND, <Footprint>=0402, <Spec>=X7R, <Termination>=SMD, AL-PN=#1-040, Creator Project=aRTy, Lead Time="21 Weeks", PartType=Capacitor, Status=Verified, SubType=Ceramic, Supplier 1=Digikey, Supplier Label="10000 pF ±10% 16V Ceramic Capacitor X7R 0402 (1005 Metric)", Type=Standard
C308 C310: library part #1-122, <Rating>=50V, <Tolerance>=0.01, <Value>=12pF, Manufacturer 1="Murata Electronics", Manufacturer Part Number 1=GJM1555C1H120FB01D, Supplier Part Number 1=490-11190-1-ND, <Footprint>=0402, <Spec>=C0G, <Termination>=SMD, AL-PN=#1-122, Creator Project=DAP, Lead Time="17 Weeks", PartType=Capacitor, Status=Verified, SubType=Ceramic, Supplier 1=Digikey, Supplier Label="12 pF ±1% 50V Ceramic Capacitor C0G, NP0 0402 (1005 Metric)", Type=Standard
CR300: library part #1-118, <Rating>=10pF, <Value>="40 MHz", Manufacturer 1="ECS Inc.", Manufacturer Part Number 1=ECS-400-10-37B2-CKY-TR, Supplier Part Number 1=50-ECS-400-10-37B2-CKY-TRCT-ND, <Spec>=40Ohm, <Termination>=SMD, AL-PN=#1-118, Creator Project=DAP, Lead Time=N/A, PartType=Crystal, Status=Verified, Supplier 1=Digikey, Supplier Label="40 MHz ±10ppm Crystal 12pF 40 Ohms 4-SMD, No Lead", Type=Standard
D100: library part #1-112, <Rating>=0.2pF, <Value>=8.4V(Cl), Manufacturer 1="Texas Instruments", Manufacturer Part Number 1=ESD122DMXR, Supplier Part Number 1=296-48543-1-ND, <Termination>=SMD, AL-PN=#1-112, Creator Project=DAP, Lead Time="9 Weeks", PartType=Diode, Status=Verified, SubType=TVS, Supplier 1=Digikey, Supplier Label="8.4V (Typ) Clamp 2.5A (8/20µs) Ipp Tvs Diode Surface Mount 3-X2SON (1x0.6)", Type=Standard
D200 D204 D205 D206 D207 D208 D209: library part #1-009, <Rating>=30mA, <Value>=2.1V, Manufacturer 1="Lite-On Inc", Manufacturer Part Number 1=LTST-C190GKT, Supplier Part Number 1=160-LTST-C190GKTTR-ND, <Spec>=GREEN, <Termination>=SMD, AL-PN=#1-009, Creator Project=Bootcamp, Lead Time="14 Weeks", PartType=Diode, Status=Verified, SubType=LED, Supplier 1=Digikey, Supplier Label="Green 569nm LED Indication - Discrete 2.1V 0603 (1608 Metric)", Type=Standard